# Altium PCB LASERDIODE_V1.1.1.PcbDoc (part 1 of 2)
Units mm, origin at the board's own origin, x right, y up, seen from the top; angles counter-clockwise.
Board outline 86 x 86 mm, 4 copper layers (Top Layer, Mid-Layer 1, Mid-Layer 2, Bottom Layer); 191 components, 97 nets, 928 pads, 583 vias.
Unrouted connection lines stored in the file: 478.
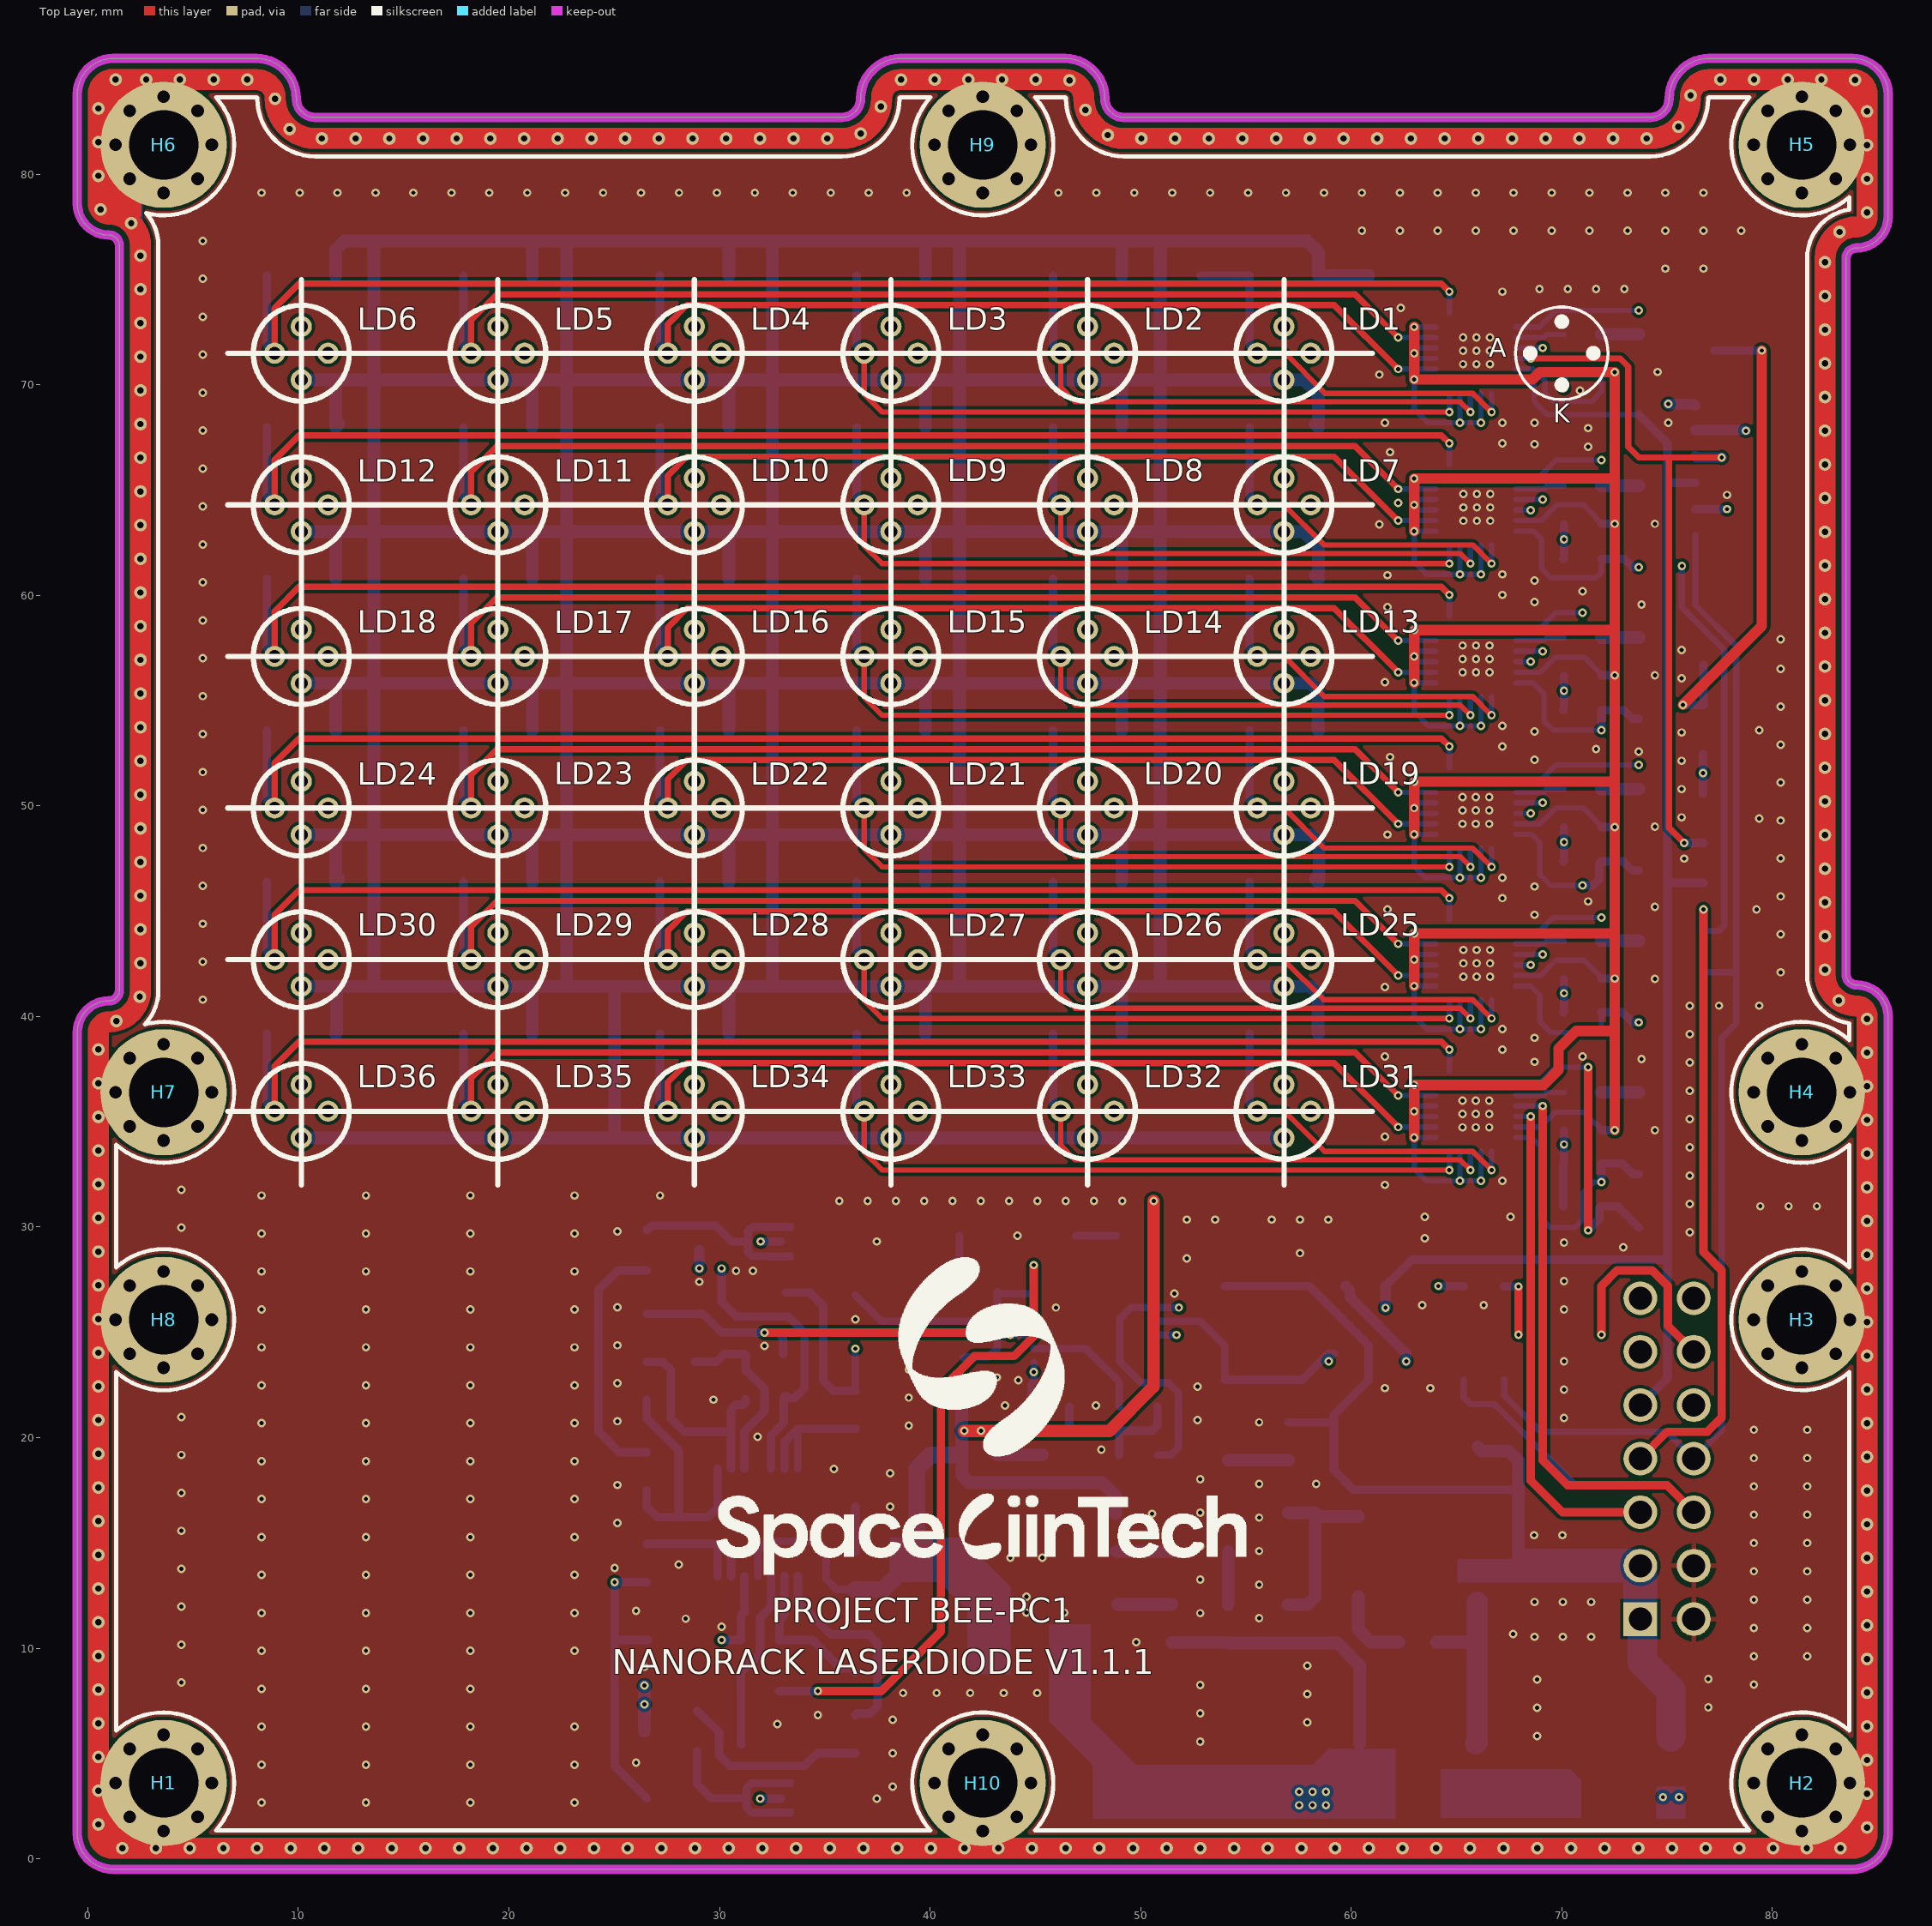
[diagram p0: Top Layer view]
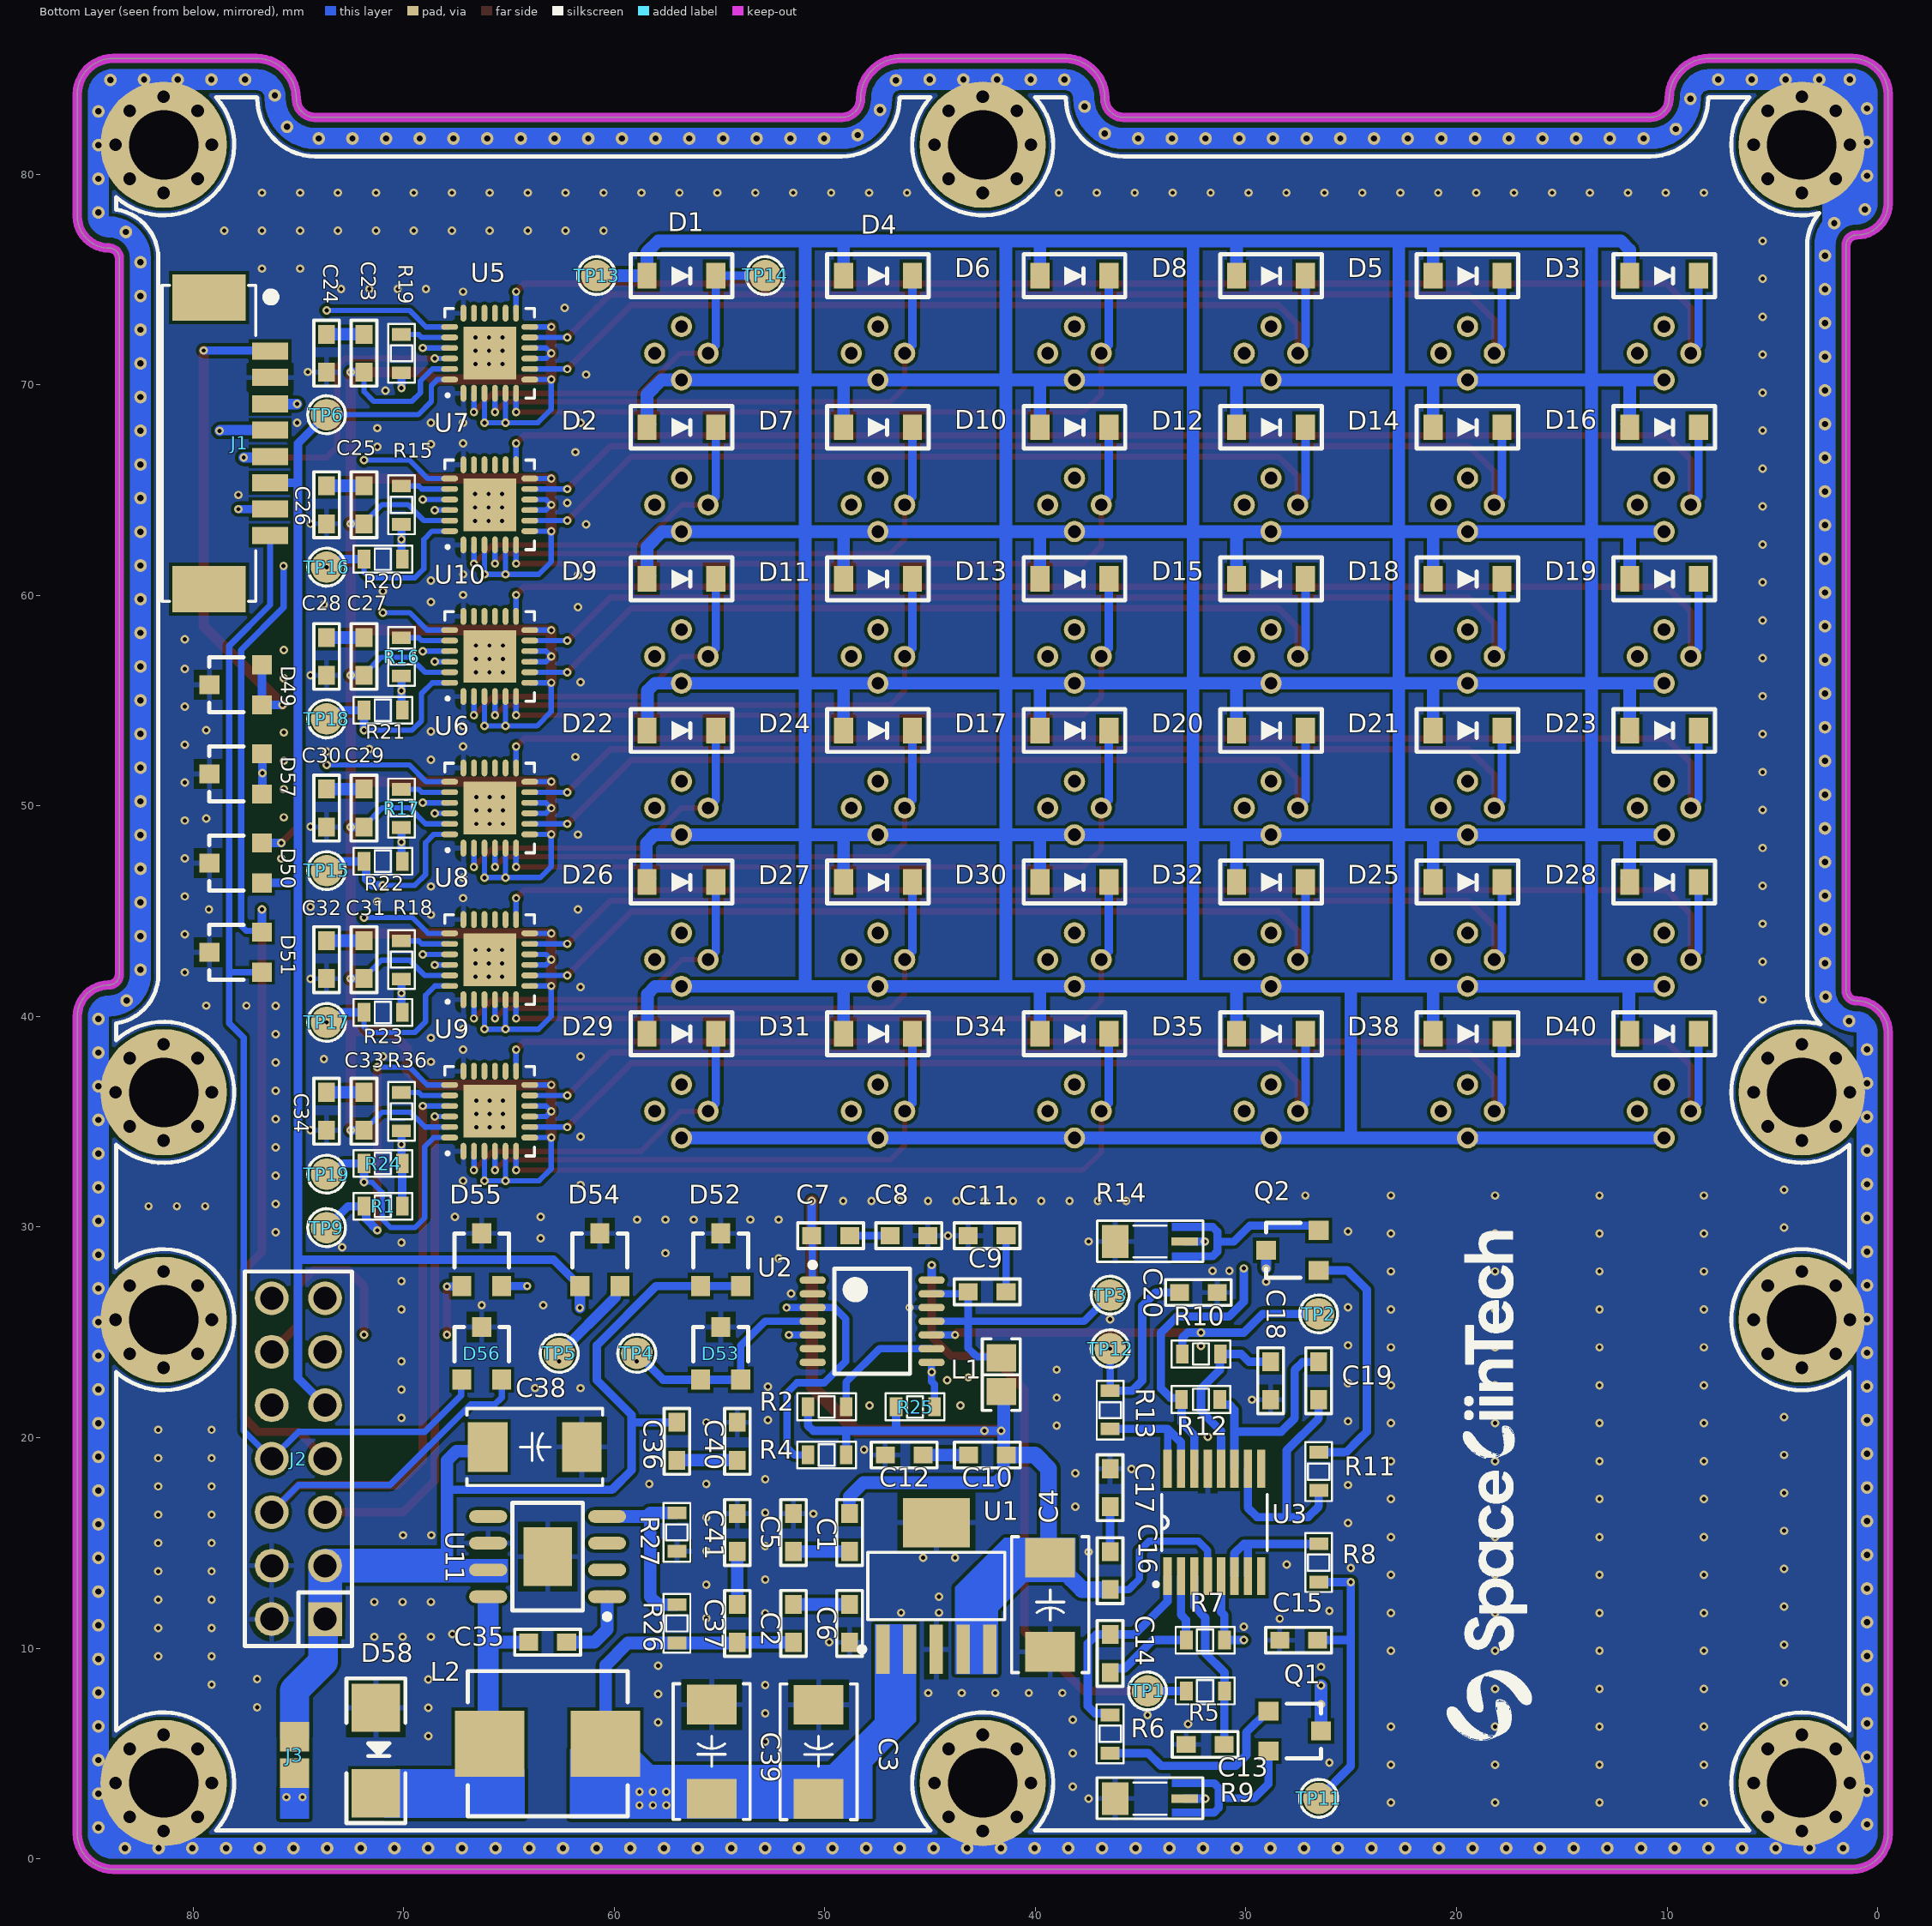
[diagram p1: Bottom Layer view, seen from below]
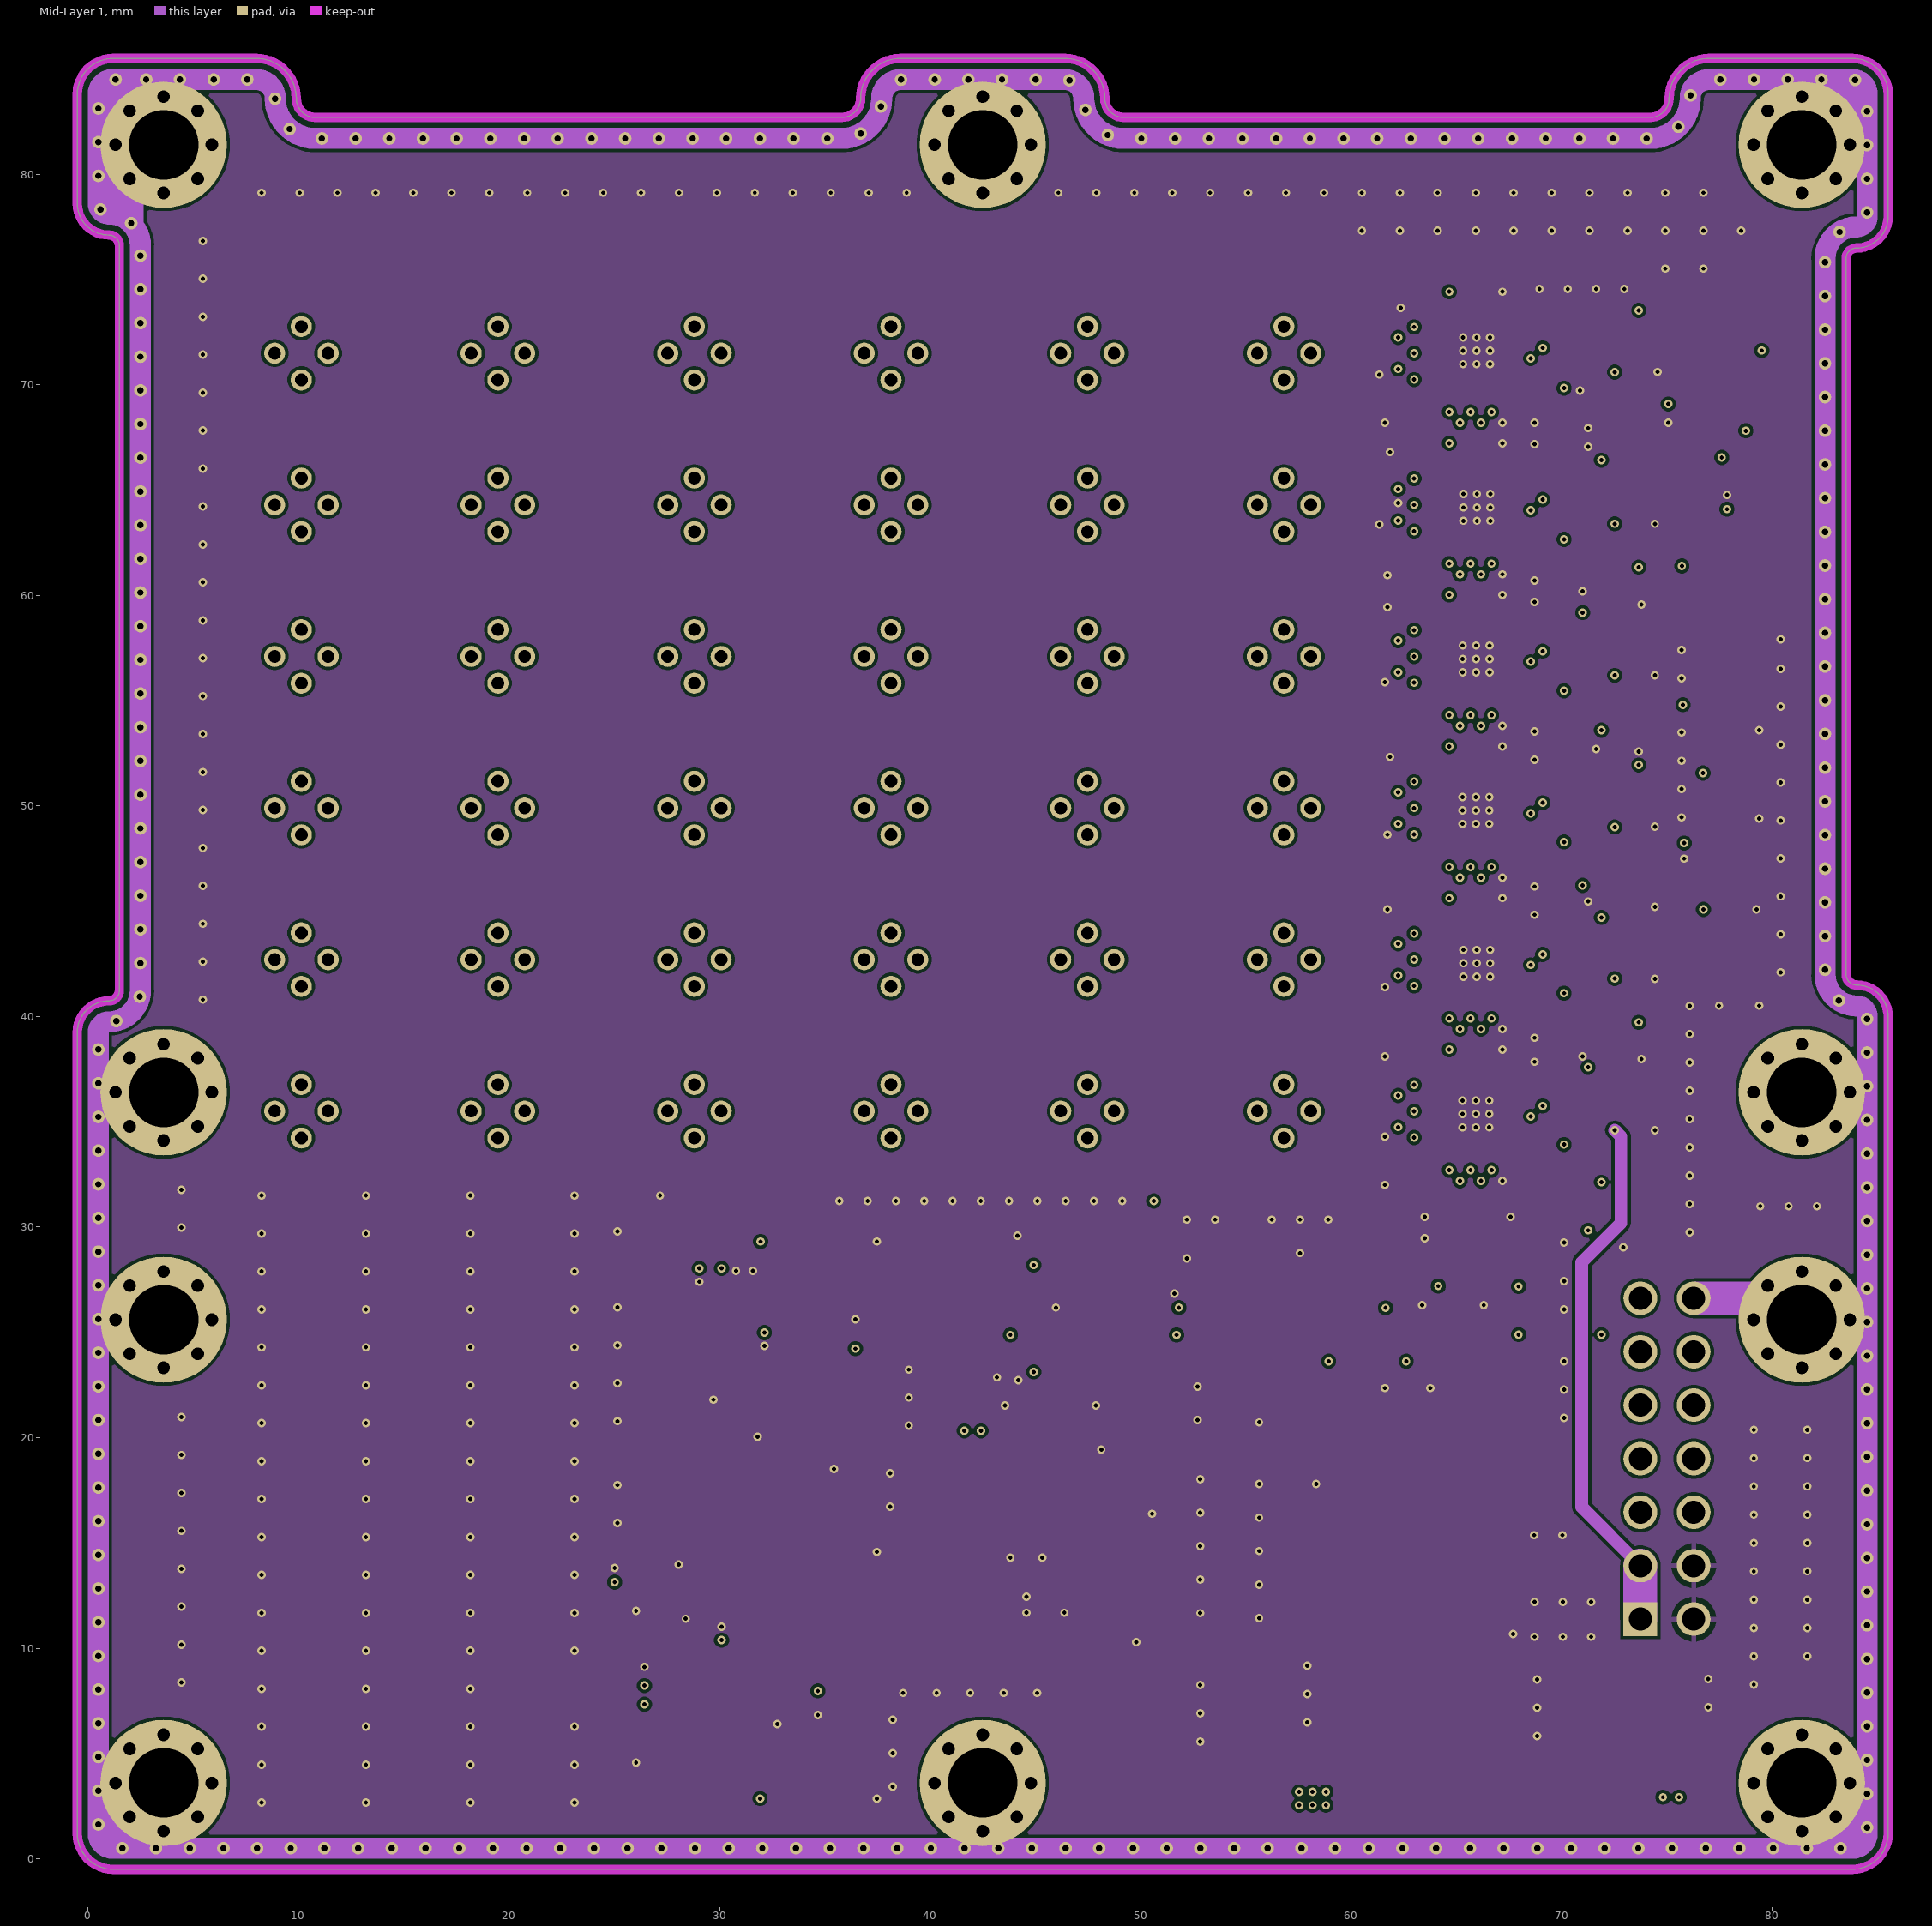
[diagram p2: Mid-Layer 1]
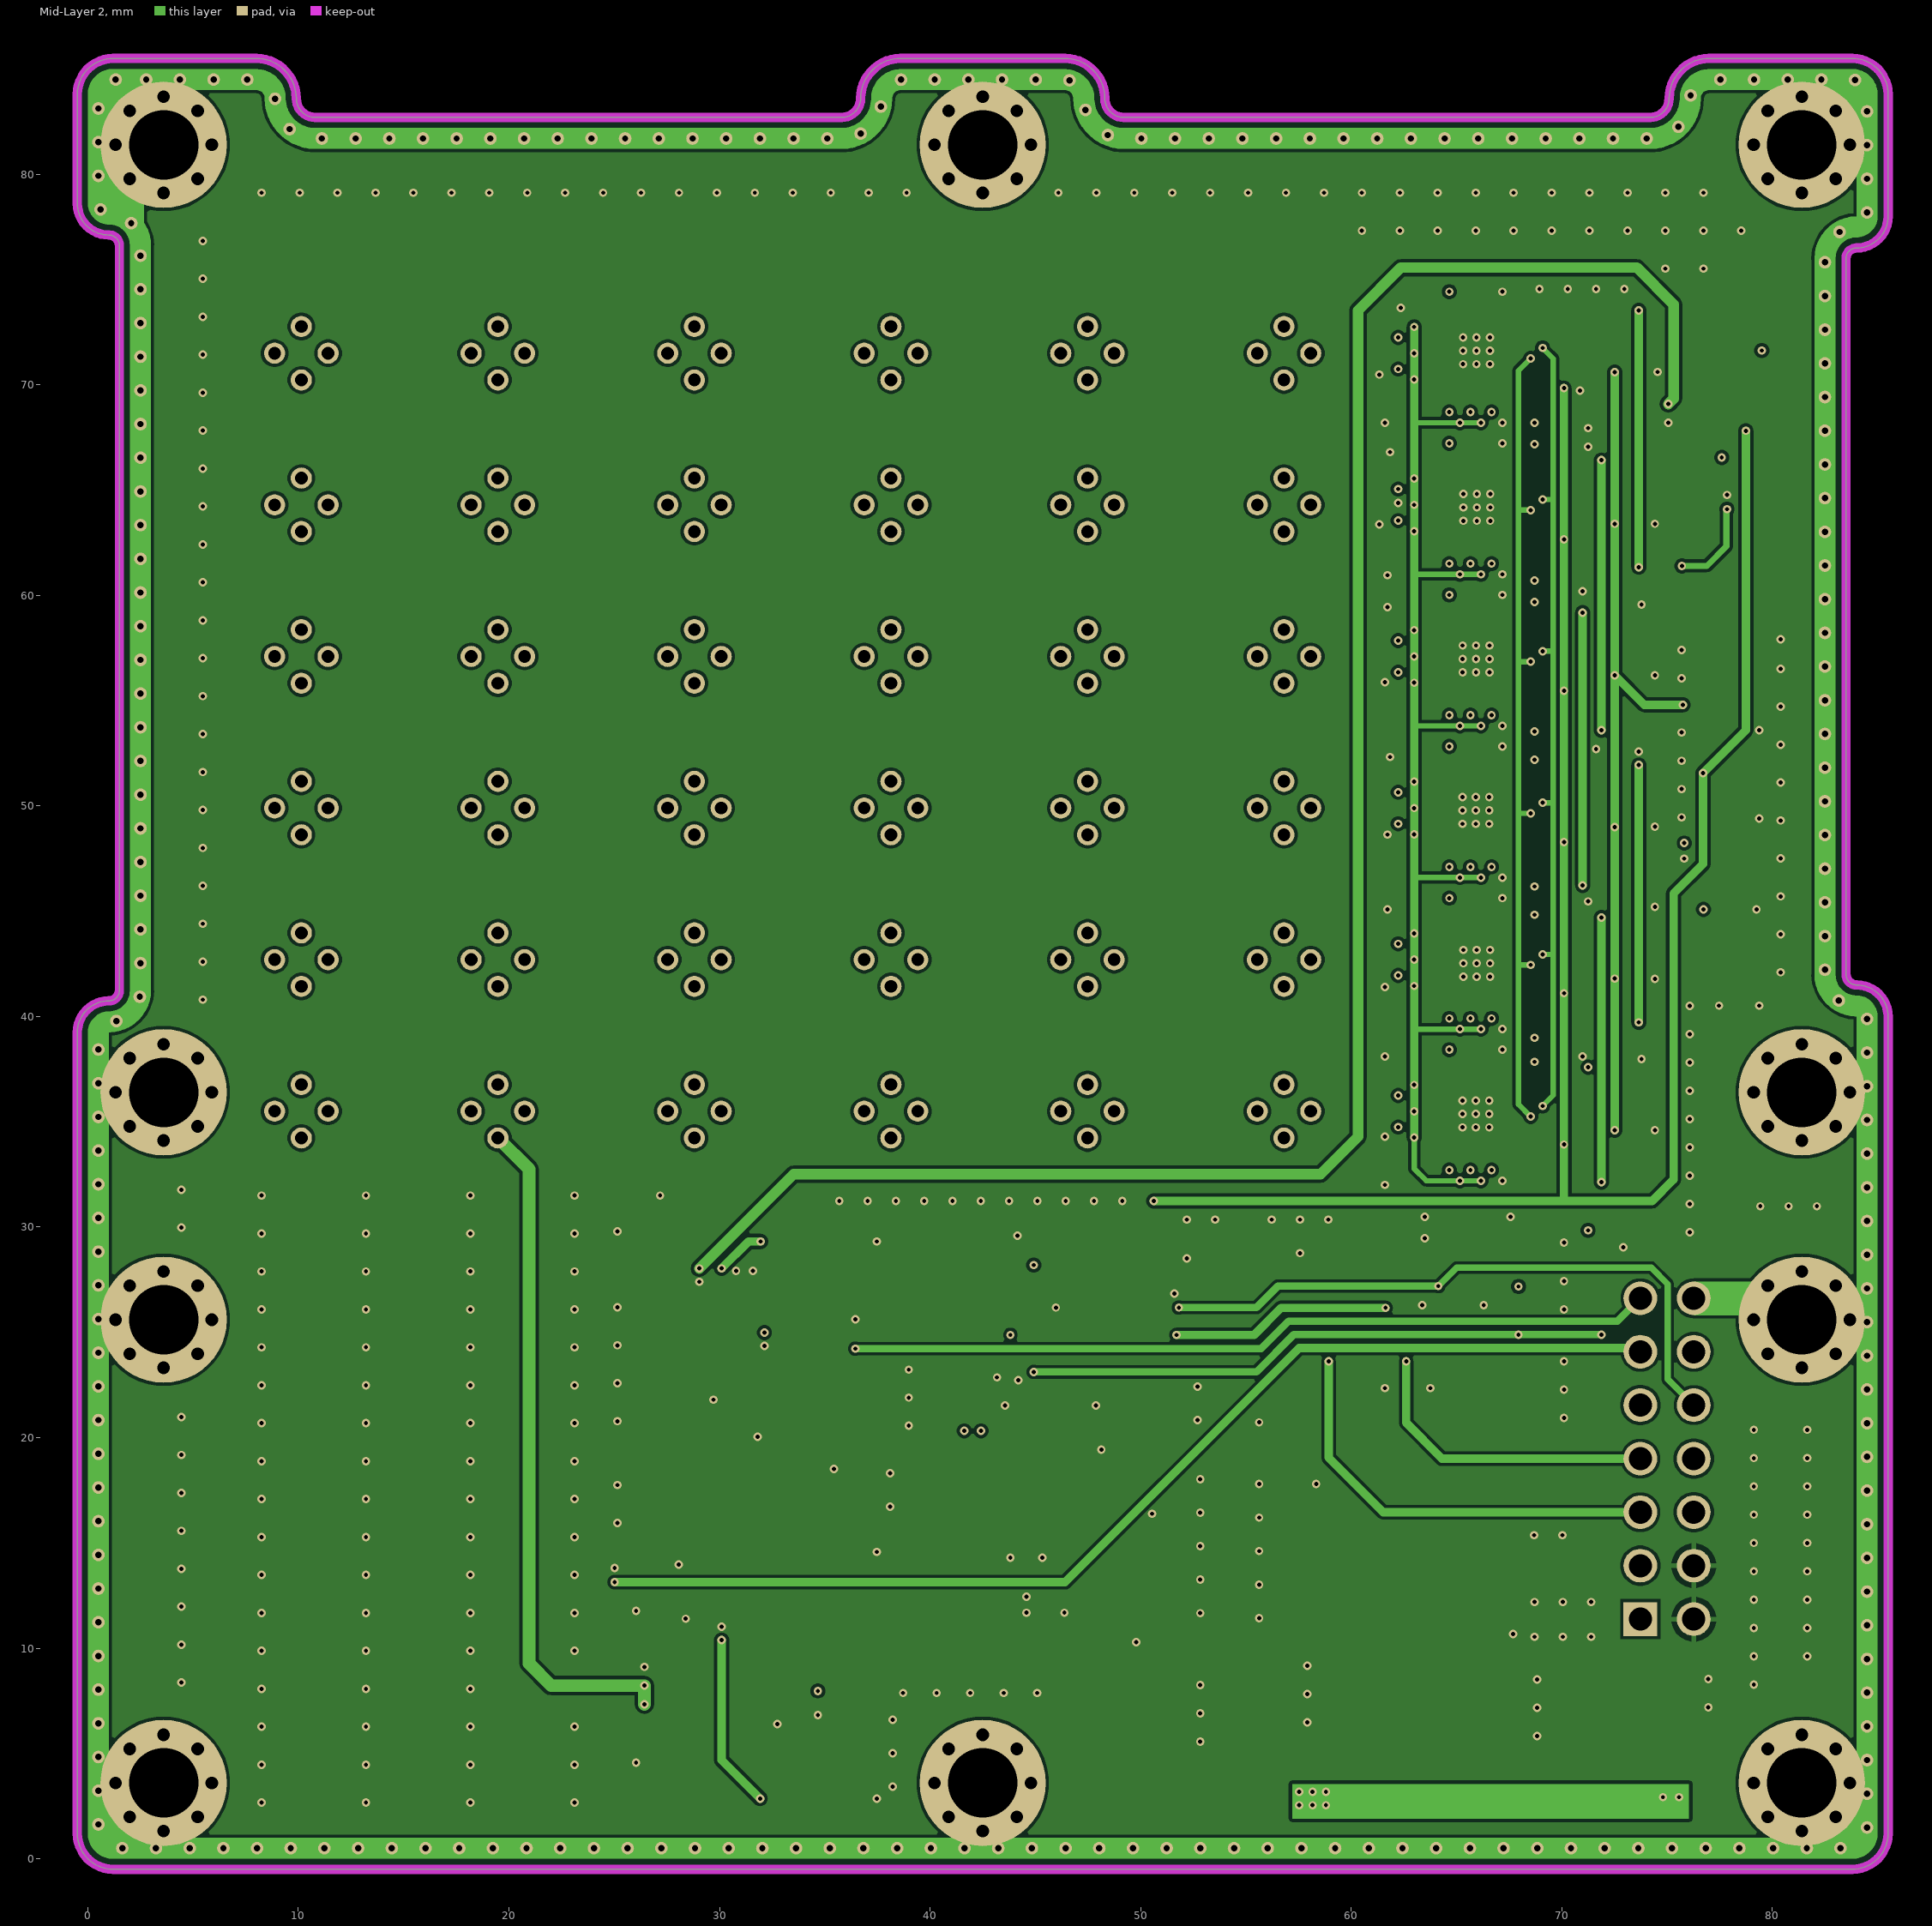
[diagram p3: Mid-Layer 2]

## Layer stack, top to bottom
Top Solder: solder mask 0.0102, Solder Resist, Dk 3.5
Top Layer: signal copper 0.0356
Dielectric 1: dielectric 0.32, FR-4, Dk 4.8
Mid-Layer 1: signal copper 0.0356
Dielectric2: dielectric 0.32, FR-4, Dk 4.8
Mid-Layer 2: signal copper 0.0356
Dielectric3: dielectric 0.32, FR-4, Dk 4.8
Bottom Layer: signal copper 0.0356
Bottom Solder: solder mask 0.0102, Solder Resist, Dk 3.5

## Board outline
-0.5,1.197 -0.5,39.243 -0.5,39.245 cw(c1,39.243) 1,40.743 ccw(c1,41.243) 1.5,41.243 1.5,76.613 ccw(c1,76.613) 1,77.113 cw(c1,78.613) -0.5,78.613 -0.5,83.8 cw(c1.2,83.8) 1.198,85.5 1.2,85.5 7.998,85.5 8,85.5 cw(c8,83.6) 9.9,83.602 9.9,83.6 ccw(c10.8,83.6) 10.8,82.7 35.8,82.7 ccw(c35.8,83.6) 36.7,83.6 36.7,83.602 cw(c38.6,83.6) 38.6,85.5 46.4,85.5 cw(c46.4,83.6) 48.3,83.602 48.3,83.6 ccw(c49.2,83.6) 49.2,82.7 74.2,82.7 ccw(c74.2,83.6) 75.1,83.6 75.1,83.602 cw(c77,83.6) 77,85.5 83.8,85.5 cw(c83.8,83.8) 85.5,83.8 85.5,78.01 85.5,78 cw(c84,78) 84,76.5 83.999,76.5 ccw(c84,76) 83.5,76 83.5,75.99 83.5,42 ccw(c84,42) 84,41.5 cw(c84,40) 85.5,40 85.5,1.202 85.5,1.2 cw(c83.8,1.2) 83.803,-0.5 83.8,-0.5 1.202,-0.5 1.2,-0.5 cw(c1.2,1.2)

## Design rules (kind name [scope] priority, off if disabled: settings)
Clearance [NOT InNet('SHIELD') and NOT OnLayer('Keep-Out Layer')] p1: gap=0.15 ignorepadtopadclearanceinfootprint=FALSE
FanoutControl Fanout_Default [All] p1: bgadir=Out bgaviamode=Centered fanoutstyle=Auto fanoutdirection=Alternating viagrid=0.025 // Fanout_Default (Default Rule)
FanoutControl Fanout_Small [(CompPinCount < 5)] p2: bgadir=Out bgaviamode=Centered fanoutstyle=Auto fanoutdirection=OutThenIn viagrid=0.025 // Fanout_Small (Default Rule)
FanoutControl Fanout_LCC [IsLCC] p4: bgadir=Out bgaviamode=Centered fanoutstyle=Auto fanoutdirection=Alternating viagrid=0.025 // Fanout_LCC (Default Rule)
FanoutControl Fanout_BGA [IsBGA] p5: bgadir=Out bgaviamode=Centered fanoutstyle=Auto fanoutdirection=Alternating viagrid=0.025 // Fanout_BGA (Default Rule)
HoleSize [All] p1: absolutevalues=TRUE maxlimit=4 minlimit=0.025 maxpercent=80.000 minpercent=20.000
HoleToHoleClearance [All] p1: gap=0.15 allowstackedmicrovias=TRUE
MinimumSolderMaskSliver [All] p1: minsoldermaskwidth=0.17
PolygonConnect [All] p1: thpad.connectstyle=Relief thpad.reliefconductorwidth=0.254 thpad.reliefentries=4 thpad.polygonreliefangle="90 Angle" thpad.airgapwidth=0.254 smdpad.connectstyle=Relief smdpad.reliefconductorwidth=0.254 smdpad.reliefentries=4 smdpad.polygonreliefangle="90 Angle" smdpad.airgapwidth=0.254 via.connectstyle=Direct via.reliefconductorwidth=0.254 via.reliefentries=4 via.polygonreliefangle="90 Angle" via.airgapwidth=0.254
RoutingVias [All] p1: holewidth=0.711 width=1.27 viastyle="Through Hole" minholewidth=0.2 minwidth=0.4 maxholewidth=0.711 maxwidth=1.27
SilkToSilkClearance [All] p1: silktosilkclearance=0.12
SilkToSolderMaskClearance [IsPad] p1: minsilkscreentomaskgap=0.12 clearancetoexposedcopper=TRUE
SolderMaskExpansion [All] p1: expansion=0.102 istentingtop=FALSE
Width [All] p1: maxlimit=3 minlimit=0.254 preferedwidth=0.6 minimp=50.000000 maximp=50.000000 favimp=50.000000
21 further rules are at their usual default settings.

## Classes and differential pairs
component class SWITCHING: C23 C24 C25 C26 C27 C28 C29 C30 C31 C32 C33 C34 D1 D2 D3 D4 D5 D6 D7 D8 D9 D10 D11 D12 D13 D14 D15 D16 D17 D18 D19 D20 D21 D22 D23 D24 D25 D26 D27 D28 D29 D30 D31 D32 D34 D35 D38 D40 LD1 LD2 LD3 LD4 LD5 LD6 LD7 LD8 LD9 LD10 LD11 LD12 LD13 LD14 LD15 LD16 LD17 LD18 LD19 LD20 LD21 LD22 LD23 LD24 LD25 LD26 LD27 LD28 LD29 LD30 LD31 LD32 LD33 LD34 LD35 LD36 R1 R15 R16 R17 R18 R19 R20 R21 R22 R23 R24 R36 t TP9 TP13 TP14 TP15 TP16 TP17 TP18 TP19 U5 U6 U7 U8 U9 U10
component class CURRENT_SOURCE: C13 C14 C15 C16 C17 C18 C19 C20 Q1 Q2 R5 R6 R7 R8 R9 R10 R11 R12 R13 R14 TP11 TP12 U3
component class "POWER SWITCH AND LDO": C1 C2 C3 C4 C5 C6 C35 C36 C37 C38 C39 C40 C41 D58 J3 L2 R26 R27 U1 U11
component class COMMUNICATION: C7 C8 C9 C10 C11 C12 D49 D50 D51 D52 D53 D54 D55 D56 D57 H1 H2 H3 H4 H5 H6 H7 H8 J1 J2 L1 R2 R4 R25 TP1 TP2 TP3 TP4 TP5 TP6 U2

## Components (designator, comment, footprint, x,y, rotation, side; value= is the part's Value field where it differs from the comment)
C1 "0.22uF/25V" SM-0603 48.819,15.494 r90 bottom
C2 "0.22uF/25V" SM-0603 51.486,11.176 r270 bottom
C3 "100uF/16V" "CAP TANT 2312" 50.292,5.08 r90 bottom
C4 "100uF/16V" "CAP TANT 2312" 39.294,12.065 r270 bottom
C5 "0.22uF/25V" SM-0603 51.486,15.494 r270 bottom
C6 "0.22uF/25V" SM-0603 48.819,11.176 r90 bottom
C7 "0.22uF/25V" SM-0603 49.72,29.589 r0 bottom
C8 "0.22uF/25V" SM-0603 46.005,29.589 r0 bottom
C9 "0.22uF/25V" SM-0603 42.291,26.924 r0 bottom
C10 "0.22uF/25V" SM-0603 42.28,19.177 r180 bottom
C11 "0.22uF/25V" SM-0603 42.291,29.589 r180 bottom
C12 "0.22uF/25V" SM-0603 46.228,19.177 r180 bottom
C13 "470pF/50V" SM-0603 31.94,5.429 r180 bottom
C14 "0.22uF/25V" SM-0603 36.449,9.747 r90 bottom
C15 "470pF/50V" SM-0603 27.496,10.382 r180 bottom
C16 "0.22uF/25V" SM-0603 36.449,13.684 r270 bottom
C17 "0.22uF/25V" SM-0603 36.449,17.621 r270 bottom
C18 "470pF/50V" SM-0603 28.829,22.701 r90 bottom
C19 "0.22uF/25V" SM-0603 26.543,22.701 r270 bottom
C20 "470pF/50V" SM-0603 32.258,26.892 r0 bottom
C23 "0.22uF/25V" SM-0603 71.882,71.5 r270 bottom
C24 "0.22uF/25V" SM-0603 73.66,71.5 r90 bottom
C25 "0.22uF/25V" SM-0603 71.882,64.3 r270 bottom
C26 "0.22uF/25V" SM-0603 73.66,64.3 r90 bottom
C27 "0.22uF/25V" SM-0603 71.882,57.1 r270 bottom
C28 "0.22uF/25V" SM-0603 73.66,57.1 r90 bottom
C29 "0.22uF/25V" SM-0603 71.882,49.9 r270 bottom
C30 "0.22uF/25V" SM-0603 73.66,49.9 r90 bottom
C31 "0.22uF/25V" SM-0603 71.882,42.7 r270 bottom
C32 "0.22uF/25V" SM-0603 73.66,42.7 r90 bottom
C33 "0.22uF/25V" SM-0603 71.882,35.5 r270 bottom
C34 "0.22uF/25V" SM-0603 73.66,35.5 r90 bottom
C35 "0.01uF/25V" SM-0603 63.163,10.287 r180 bottom
C36 "0.22uF/25V" SM-0603 57.023,19.825 r90 bottom
C37 "0.22uF/25V" SM-0603 54.153,11.176 r270 bottom
C38 "100uF/16V" "CAP TANT 2312" 63.772,19.558 r180 bottom
C39 "100uF/16V" "CAP TANT 2312" 55.372,5.089 r90 bottom
C40 "0.22uF/25V" SM-0603 54.153,19.825 r270 bottom
C41 "0.22uF/25V" SM-0603 54.153,15.494 r270 bottom
D1 "1N4148W-TP" SOD23 58.461,75.184 r180 bottom
D2 "1N4148W-TP" SOD23 58.461,67.984 r180 bottom
D3 "1N4148W-TP" SOD23 11.791,75.184 r180 bottom
D4 "1N4148W-TP" SOD23 49.127,75.184 r180 bottom
D5 "1N4148W-TP" SOD23 21.125,75.184 r180 bottom
D6 "1N4148W-TP" SOD23 39.793,75.184 r180 bottom
D7 "1N4148W-TP" SOD23 49.127,67.984 r180 bottom
D8 "1N4148W-TP" SOD23 30.459,75.184 r180 bottom
D9 "1N4148W-TP" SOD23 58.461,60.784 r180 bottom
D10 "1N4148W-TP" SOD23 39.793,67.984 r180 bottom
D11 "1N4148W-TP" SOD23 49.127,60.784 r180 bottom
D12 "1N4148W-TP" SOD23 30.459,67.984 r180 bottom
D13 "1N4148W-TP" SOD23 39.793,60.784 r180 bottom
D14 "1N4148W-TP" SOD23 21.125,67.984 r180 bottom
D15 "1N4148W-TP" SOD23 30.459,60.784 r180 bottom
D16 "1N4148W-TP" SOD23 11.791,67.984 r180 bottom
D17 "1N4148W-TP" SOD23 39.793,53.584 r180 bottom
D18 "1N4148W-TP" SOD23 21.125,60.784 r180 bottom
D19 "1N4148W-TP" SOD23 11.791,60.784 r180 bottom
D20 "1N4148W-TP" SOD23 30.459,53.584 r180 bottom
D21 "1N4148W-TP" SOD23 21.125,53.584 r180 bottom
D22 "1N4148W-TP" SOD23 58.461,53.584 r180 bottom
D23 "1N4148W-TP" SOD23 11.791,53.584 r180 bottom
D24 "1N4148W-TP" SOD23 49.127,53.584 r180 bottom
D25 "1N4148W-TP" SOD23 21.125,46.384 r180 bottom
D26 "1N4148W-TP" SOD23 58.461,46.384 r180 bottom
D27 "1N4148W-TP" SOD23 49.127,46.384 r180 bottom
D28 "1N4148W-TP" SOD23 11.791,46.384 r180 bottom
D29 "1N4148W-TP" SOD23 58.461,39.184 r180 bottom
D30 "1N4148W-TP" SOD23 39.793,46.384 r180 bottom
D31 "1N4148W-TP" SOD23 49.127,39.184 r180 bottom
D32 "1N4148W-TP" SOD23 30.459,46.384 r180 bottom
D34 "1N4148W-TP" SOD23 39.793,39.184 r180 bottom
D35 "1N4148W-TP" SOD23 30.459,39.184 r180 bottom
D38 "1N4148W-TP" SOD23 21.125,39.184 r180 bottom
D40 "1N4148W-TP" SOD23 11.791,39.184 r180 bottom
D49 "S2312" SOT23-123 77.978,55.753 r90 bottom
D50 "S2303" SOT23-123 77.978,47.286 r90 bottom
D51 "S2303" SOT23-123 77.978,43.053 r90 bottom
D52 "S2312" SOT23-123 54.943,28.448 r180 bottom
D53 "S2303" SOT23-123 54.943,24.003 r180 bottom
D54 "S2303" SOT23-123 60.682,28.448 r180 bottom
D55 "S2303" SOT23-123 66.294,28.448 r180 bottom
D56 "S2303" SOT23-123 66.294,24.003 r180 bottom
D57 "S2303" SOT23-123 77.978,51.52 r90 bottom
D58 "SS54" DIO-SMD-A 71.19,5.265 r90 bottom
H1 "HOLD" M3 3.6,3.6 r0 top
H2 "HOLD" M3 81.4,3.6 r0 top
H3 "HOLD" M3 81.4,25.6 r0 top
H4 "HOLD" M3 81.4,36.4 r0 top
H5 "HOLD" M3 81.4,81.4 r0 top
H6 "HOLD" M3 3.6,81.4 r0 top
H7 "HOLD" M3 3.6,36.4 r0 top
H8 "HOLD" M3 3.6,25.6 r0 top
H9 "HOLD" M3 42.5,81.4 r0 top
H10 "HOLD" M3 42.5,3.6 r0 top
J1 "LASER EXT" 0532610871 79.248,67.223 r90 bottom
J2 "JP7x2" JP7-D2T 75,19 r90 bottom
J3 "BYPASS/DNP" BIG_CONNECTOR 75.184,5.794 r270 bottom
L1 "10uH" "FER 0805/2012" 41.617,22.987 r270 bottom
L2 "15uH/3.5A" SRP7050TA 63.163,5.461 r180 bottom
LD1 "LaserDiode" LASER_SOCKET 56.81,71.5 r0 top
LD2 "LaserDiode" LASER_SOCKET 47.476,71.5 r0 top
LD3 "LaserDiode" LASER_SOCKET 38.142,71.5 r0 top
LD4 "LaserDiode" LASER_SOCKET 28.808,71.5 r0 top
LD5 "LaserDiode" LASER_SOCKET 19.474,71.5 r0 top
LD6 "LaserDiode" LASER_SOCKET 10.14,71.5 r0 top
LD7 "LaserDiode" LASER_SOCKET 56.81,64.3 r0 top
LD8 "LaserDiode" LASER_SOCKET 47.476,64.3 r0 top
LD9 "LaserDiode" LASER_SOCKET 38.142,64.3 r0 top
LD10 "LaserDiode" LASER_SOCKET 28.808,64.3 r0 top
LD11 "LaserDiode" LASER_SOCKET 19.474,64.3 r0 top
LD12 "LaserDiode" LASER_SOCKET 10.14,64.3 r0 top
LD13 "LaserDiode" LASER_SOCKET 56.81,57.1 r0 top
LD14 "LaserDiode" LASER_SOCKET 47.476,57.1 r0 top
LD15 "LaserDiode" LASER_SOCKET 38.142,57.1 r0 top
LD16 "LaserDiode" LASER_SOCKET 28.808,57.1 r0 top
LD17 "LaserDiode" LASER_SOCKET 19.474,57.1 r0 top
LD18 "LaserDiode" LASER_SOCKET 10.14,57.1 r0 top
LD19 "LaserDiode" LASER_SOCKET 56.81,49.9 r0 top
LD20 "LaserDiode" LASER_SOCKET 47.476,49.9 r0 top
LD21 "LaserDiode" LASER_SOCKET 38.142,49.9 r0 top
LD22 "LaserDiode" LASER_SOCKET 28.808,49.9 r0 top
LD23 "LaserDiode" LASER_SOCKET 19.474,49.9 r0 top
LD24 "LaserDiode" LASER_SOCKET 10.14,49.9 r0 top
LD25 "LaserDiode" LASER_SOCKET 56.81,42.7 r0 top
LD26 "LaserDiode" LASER_SOCKET 47.476,42.7 r0 top
LD27 "LaserDiode" LASER_SOCKET 38.142,42.7 r0 top
LD28 "LaserDiode" LASER_SOCKET 28.808,42.7 r0 top
LD29 "LaserDiode" LASER_SOCKET 19.474,42.7 r0 top
LD30 "LaserDiode" LASER_SOCKET 10.14,42.7 r0 top
LD31 "LaserDiode" LASER_SOCKET 56.81,35.5 r0 top
LD32 "LaserDiode" LASER_SOCKET 47.476,35.5 r0 top
LD33 "LaserDiode" LASER_SOCKET 38.142,35.5 r0 top
LD34 "LaserDiode" LASER_SOCKET 28.808,35.5 r0 top
LD35 "LaserDiode" LASER_SOCKET 19.474,35.5 r0 top
LD36 "LaserDiode" LASER_SOCKET 10.14,35.5 r0 top
Q1 "AO3400" SOT23-132 27.685,6.064 r270 bottom
Q2 "AO3400" SOT23-132 27.793,28.894 r90 bottom
R1 "4.7K 1%" RES-SMD-0603 70.993,30.988 r180 bottom
R2 "4.7K 1%" RES-SMD-0603 49.911,21.463 r180 bottom
R4 "4.7K 1%" RES-SMD-0603 49.911,19.177 r180 bottom
R5 "50R 1%" RES-SMD-0603 31.94,7.969 r180 bottom
R6 "100R 1%" RES-SMD-0603 36.45,5.937 r270 bottom
R7 "1K 1%" RES-SMD-0603 31.94,10.382 r180 bottom
R8 "50R 1%" RES-SMD-0603 26.543,14.065 r270 bottom
R9 "250R 1%" RES-SMD-1206 34.557,2.86 r180 bottom
R10 "50R 1%" RES-SMD-0603 32.131,23.971 r180 bottom
R11 "100R 1%" RES-SMD-0603 26.543,18.383 r90 bottom
R12 "1K 1%" RES-SMD-0603 32.131,21.812 r0 bottom
R13 "50R 1%" RES-SMD-0603 36.449,21.304 r90 bottom
R14 "250R 1%" RES-SMD-1206 34.556,29.315 r180 bottom
R15 "4.7K 1%" RES-SMD-0603 70.104,64.3 r270 bottom
R16 "4.7K 1%" RES-SMD-0603 70.104,57.1 r270 bottom
R17 "4.7K 1%" RES-SMD-0603 70.104,49.9 r270 bottom
R18 "4.7K 1%" RES-SMD-0603 70.104,42.7 r270 bottom
R19 "4.7K 1%" RES-SMD-0603 70.104,71.5 r270 bottom
R20 "4.7K 1%" RES-SMD-0603 70.993,61.722 r180 bottom
R21 "4.7K 1%" RES-SMD-0603 70.993,54.546 r180 bottom
R22 "4.7K 1%" RES-SMD-0603 70.993,47.371 r180 bottom
R23 "4.7K 1%" RES-SMD-0603 70.993,40.195 r180 bottom
R24 "4.7K 1%" RES-SMD-0603 70.993,33.02 r180 bottom
R25 "4.7K 1%" RES-SMD-0603 45.72,21.463 r180 bottom
R26 "10K 1%" RES-SMD-0603 57.023,11.176 r270 bottom
R27 "3.24K 0.1%" RES-SMD-0603 57.023,15.494 r90 bottom
R36 "4.7K 1%" RES-SMD-0603 70.104,35.5 r270 bottom
TP1 "Test_Point" TESTPOINT 34.671,7.969 r180 bottom
TP2 "Test_Point" TESTPOINT 26.543,25.876 r90 bottom
TP3 "Test_Point" TESTPOINT 36.449,26.765 r90 bottom
TP4 "Test_Point" TESTPOINT 58.928,24.003 r90 bottom
TP5 "Test_Point" TESTPOINT 62.611,24.003 r90 bottom
TP6 "Test_Point" TESTPOINT 73.66,68.58 r90 bottom
TP9 "Test_Point" TESTPOINT 73.66,29.972 r90 bottom
TP11 "Test_Point" TESTPOINT 26.543,2.872 r0 bottom
TP12 "Test_Point" TESTPOINT 36.449,24.225 r90 bottom
TP13 "Test_Point" TESTPOINT 60.833,75.184 r90 bottom
TP14 "Test_Point" TESTPOINT 52.832,75.184 r90 bottom
TP15 "Test_Point" TESTPOINT 73.66,46.926 r90 bottom
TP16 "Test_Point" TESTPOINT 73.66,61.341 r90 bottom
TP17 "Test_Point" TESTPOINT 73.66,39.719 r90 bottom
TP18 "Test_Point" TESTPOINT 73.66,54.134 r180 bottom
TP19 "Test_Point" TESTPOINT 73.66,32.512 r180 bottom
U1 "TPS7A4533DCQR" SOT223-6 44.704,12.954 r90 bottom
U2 "MCP4902-E/ST" TSSOP14 47.752,25.527 r180 bottom
U3 "OPA4340" SSOP16 31.496,15.97 r90 bottom
U5 "ADG1414BCPZ" ADG1414BCPZ 65.913,71.5 r90 bottom
U6 "ADG1414BCPZ" ADG1414BCPZ 65.913,49.9 r90 bottom
U7 "ADG1414BCPZ" ADG1414BCPZ 65.913,64.3 r90 bottom
U8 "ADG1414BCPZ" ADG1414BCPZ 65.913,42.7 r90 bottom
U9 "ADG1414BCPZ" ADG1414BCPZ 65.913,35.5 r90 bottom
U10 "ADG1414BCPZ" ADG1414BCPZ 65.913,57.1 r90 bottom
U11 "TPS5430DDAR" HSOP8 63.163,14.351 r0 bottom

## Footprints (in the part's own frame and the unit in brackets; to place one, negate y for a bottom-side part, rotate by r counter-clockwise, add the part's x,y. Pads: shape width x height; smd on the part's side, far side on the other; paste and mask are expansions set on the pad)
0532610871 [mil] "CONN HEADER SMD R/A 8POS 1.25MM"
  rect 32x67 smd paste+0 mask+0: 1(172.24,-114.35) 2(123.03,-114.35) 3(73.82,-114.35) 4(24.61,-114.35) 5(-24.61,-114.35) 6(-73.82,-114.35) 7(-123.03,-114.35) 8(-172.24,-114.35)
  rect 87x137.8 smd mask+1.97: 9(-272.64,-0.18) 10(272.64,-0.18)
  silkscreen extent -296,-122 296,88, body extent -299,-123 298,81, height 134
ADG1414BCPZ [mm] "IC SW SPST-NOX8 11.5OHM 24LFCSP"
  rrect100% 0.805x0.275 smd mask+0.05: 1(-1.902,1.25) 2(-1.902,0.75) 3(-1.902,0.25) 4(-1.902,-0.25) 5(-1.902,-0.75) 6(-1.902,-1.25) 13(1.902,-1.25) 14(1.902,-0.75) 15(1.902,-0.25) 16(1.902,0.25) 17(1.902,0.75) 18(1.902,1.25)
  rrect100% 0.275x0.805 smd mask+0.05: 7(-1.25,-1.902) 8(-0.75,-1.902) 9(-0.25,-1.902) 10(0.25,-1.902) 11(0.75,-1.902) 12(1.25,-1.902) 19(1.25,1.902) 20(0.75,1.902) 21(0.25,1.902) 22(-0.25,1.902) 23(-0.75,1.902) 24(-1.25,1.902)
  rect 2.5x2.5 smd paste+0 mask+0.05: HTAB(0,0)
  silkscreen extent -2.13,-2.13 2.13,2.13, body extent -2,-2 2,2, height 0.6
BIG_CONNECTOR [mm]
  rect 1.4x1.4 smd: 1(0,0) 2(1.73,0)
"CAP TANT 2312" [mil]
  rect 74x93 smd paste+0 mask+0: 1(-88,0) 2(88,0)
  silkscreen extent -127,-72 127,72, body extent -118,-63 118,63, height 110
DIO-SMD-A [mil]
  rect 90x90.55 smd: 1(75,5) 2(-85,5)
  silkscreen extent -141,-50 130,60, body extent -104,-45 101,57, height 95
"FER 0805/2012" [mm] "Chip Ferrite, 2-Leads, Body 2.00x1.20mm, IPC Medium Density"
  rect 1.3x1.4 smd mask+0.05: 1(-0.8,0) 2(0.8,0)
  silkscreen extent -1.7,-0.9 1.7,0.9, body extent -1,-0.64 1,0.64, height 1.26
HSOP8 [mm] "SOIC, 8-Leads, Body 4.9x3.9mm, Pitch 1.27mm, IPC High Density"
  oval 1.8x0.6 smd: 1(-2.825,1.905) 2(-2.825,0.635) 3(-2.825,-0.635) 4(-2.825,-1.905) 5(2.825,-1.905) 6(2.825,-0.635) 7(2.825,0.635) 8(2.825,1.905)
  rect 2.3x2.8 smd: 9(0,0)
  silkscreen extent -2.95,-2.55 1.68,2.98, body extent -2.99,-2.45 3,2.45, height 1.6
JP7-D2T [mm] "14 pins, dual pin, straight, gold plating"
  rect 1.6x1.6 hole 1.1: 1(-7.62,-1.27)
  round 1.6 hole 1.1: 2(-5.08,-1.27) 3(-2.54,-1.27) 4(0,-1.27) 5(2.54,-1.27) 6(5.08,-1.27) 7(7.62,-1.27) 8(7.62,1.27) 9(5.08,1.27) 10(2.54,1.27) 11(0,1.27) 12(-2.54,1.27) 13(-5.08,1.27) 14(-7.62,1.27)
  silkscreen extent -8.89,-2.54 8.89,2.54, body extent -8.89,-2.54 8.89,2.54, height 8.55
LASER_SOCKET [mm]
  round 1 hole 0.6: 1(-1.27,0) 2(0,-1.27) 3(0,1.27) 4(1.27,0)
  silkscreen extent -2.28,-2.28 2.28,2.28, body extent -1.75,-1.75 1.75,1.75, height 7.62
M3 [mm]
  round 1.2 hole 0.6: 1(-2.286,0) 1(-1.616,-1.616) 1(-1.616,1.616) 1(0,-2.286) 1(0,2.286) 1(1.616,-1.616) 1(1.616,1.616) 1(2.286,0)
  round 6 hole 3.3: 1(0,0)
RES-SMD-0603 [mm]
  rect 0.6x0.9 smd: 1(-0.889,0) 2(0.927,0)
  silkscreen extent -1.4,-0.64 1.4,0.64, body extent -0.8,-0.4 0.8,0.4, height 0.43
RES-SMD-1206 [mm]
  rect 1.27x1.55 smd: 1(-1.651,0)
  rect 1.27x0.4 smd: 2(1.651,0)
  silkscreen extent -2.51,-0.97 2.51,0.99, body extent -1.6,-0.8 1.6,0.8, height 1.02
SM-0603 [mm]
  rect 0.9x0.8 smd: 1(-0.9,0) 2(0.9,0)
  silkscreen extent -1.56,-0.61 1.56,0.61, body extent -0.81,-0.4 0.79,0.4, height 0.5
SOD23 [mm]
  rect 0.91x1.22 smd: 1(0.016,0) 2(3.286,0)
  silkscreen extent -0.76,-1.02 4.06,1.02, body extent -0.22,-0.85 3.53,0.85, height 1.2
SOT23-123 [mm] "SOT23, 1=bottom-left, 2=top, 3=bottom-right"
  rect 0.9x0.95 smd: 1(-0.95,-1.25) 2(0,1.25)
  rect 0.9x0.95 smd mask+0: 3(0.95,-1.25)
  silkscreen extent -1.3,-0.38 1.3,1.25, body extent -1.52,-1.23 1.48,1.27, height 1.06
SOT23-132 [mm]
  rect 0.9x0.95 smd: 1(-0.95,-1.25) 3(0,1.25)
  rect 0.9x0.95 smd mask+0: 2(0.95,-1.25)
  silkscreen extent -1.3,-0.38 1.3,1.25, body extent -1.52,-1.23 1.48,1.27, height 1.06
SOT223-6 [mm]
  rect 2.346x0.632 smd paste+0 mask+0: 1(-3.01,2.54) 2(-3.01,1.27) 3(-3.01,0) 4(-3.01,-1.27) 5(-3.01,-2.54)
  rect 2.346x3.172 smd paste+0 mask+0: 6(3.01,0)
  silkscreen extent -3.14,-3.25 1.6,3.66, body extent -3.55,-3.25 3.55,3.25, height 1.66
SRP7050TA [mm] "Precision Wire Wound Inductor, 2-Leads, Body 7.30x6.60mm, IPC Medium Density"
  rect 3.3x3.15 smd: 1(-2.75,0) 2(2.75,0)
  silkscreen extent -3.8,-3.45 3.8,3.45, body extent -3.6,-3.3 3.6,3.3, height 4.91
SSOP16 [mm]
  rect 1.8x0.4 smd mask+0.05: 1(-2.553,2.222) 2(-2.553,1.588) 3(-2.553,0.953) 4(-2.553,0.318) 5(-2.553,-0.317) 6(-2.553,-0.952) 7(-2.553,-1.587) 8(-2.553,-2.222) 9(2.553,-2.222) 10(2.553,-1.588) 11(2.553,-0.953) 12(2.553,-0.318) 13(2.553,0.317) 14(2.553,0.952) 15(2.553,1.587) 16(2.553,2.222)
  silkscreen extent -3,-2.5 1.33,2.84, body extent -3,-2.45 3,2.45, height 1.75
TESTPOINT [mm]
  round 1.5 smd: 1(0,0)
  silkscreen extent -0.9,-0.9 0.9,0.9
TSSOP14 [mm] "TSSOP, 14-Leads, Body 5.00x4.40mm, Pitch 0.65mm, IPC High Density"
  oval 1.25x0.35 smd mask+0.05: 1(-2.825,1.95) 2(-2.825,1.3) 3(-2.825,0.65) 4(-2.825,0) 5(-2.825,-0.65) 6(-2.825,-1.3) 7(-2.825,-1.95) 8(2.825,-1.95) 9(2.825,-1.3) 10(2.825,-0.65) 11(2.825,0) 12(2.825,0.65) 13(2.825,1.3) 14(2.825,1.95)
  silkscreen extent -2.95,-2.5 1.8,2.8, body extent -3.23,-2.55 3.23,2.55, height 1.25

## Part data
C1 C2 C5 C6 C7 C8 C9 C10 C11 C12 C13 C14 C15 C16 C17 C18 C19 C20 C23 C24 C25 C26 C27 C28 C29 C30 C31 C32 C33 C34 C35 C36 C37 C40 C41: library part CM, "0603"
C3 C4 C38 C39: library part CN-ALU-SMD, "Polarized Capacitor (Axial)"
D1 D2 D3 D4 D5 D6 D7 D8 D9 D10 D11 D12 D13 D14 D15 D16 D17 D18 D19 D20 D21 D22 D23 D24 D25 D26 D27 D28 D29 D30 D31 D32 D34 D35 D38 D40: library part "Diode SMD", "DIODE GEN PURP 100V 150MA SOD123"
D49 D52: library part S2315, "TVS DIODE 12VWM 19VC SOT23, P/N:  S2312"
D50 D51 D53 D54 D55 D56 D57: "TVS DIODE 3.3VWM 8VC SOT23, P/N:   / S2303"
D58: library part "Diode SMD", "DIODE SCHOTTKY 40V 5A SMA"
H1 H2 H3 H4 H5 H6 H7 H8 H9 H10: library part PAD_HOLD
J1: library part JP8, "WR-PHD 2.54 mm Angled Socket Header"
J2: "WR-PHD 2.54 mm Dual Socket Header"
J3: library part CNT, "DNP"
L1: library part Inductor, "MLZ1608N100LT000"
L2: library part INDUCTOR, "SRP7050TA-150M"
LD1 LD2 LD3 LD4 LD5 LD6 LD7 LD8 LD9 LD10 LD11 LD12 LD13 LD14 LD15 LD16 LD17 LD18 LD19 LD20 LD21 LD22 LD23 LD24 LD25 LD26 LD27 LD28 LD29 LD30 LD31 LD32 LD33 LD34 LD35 LD36: library part LD
Q1 Q2: library part FET-N
R1 R2 R4 R5 R6 R7 R8 R10 R11 R12 R13 R14 R15 R16 R17 R18 R19 R20 R21 R22 R23 R24 R25 R26 R36: library part Res-SMD, "0603"
R9: library part Res-SMD, "1206"
R27: library part Res-SMD, "ERA-3AEB3241V"
U1: "IC REG LINEAR 3.3V 1.5A SOT223-6"
U2: library part MCP4902, "IC DAC 8BIT V-OUT 14TSSOP"
U3: "IC CMOS 4 CIRCUIT 16SSOP"
U5 U6 U7 U8 U9 U10: library part ADG1414, "IC SW SPST-NOX8 11.5OHM 24LFCSP"
U11: library part TPS543X, "8SOP"

## Free pads (board coordinates)
  round 0.6 hole 0.3: 1(0.502,1.632) 1(0.502,3.232) 1(0.502,4.832) 1(0.502,6.432) 1(0.502,8.032) 1(0.502,9.632) 1(0.502,11.232) 1(0.502,12.832) 1(0.502,14.432) 1(0.502,16.032) 1(0.502,17.632) 1(0.502,19.232) 1(0.502,20.832) 1(0.502,22.432) 1(0.502,24.032) 1(0.502,25.632) 1(0.502,27.232) 1(0.502,28.832) 1(0.502,30.432) 1(0.502,32.032) 1(0.502,33.632) 1(0.502,35.232) 1(0.502,36.832) 1(0.502,38.432) 1(0.502,79.924) 1(0.502,81.524) 1(0.502,83.124) 1(0.601,78.327) 1(1.323,84.498) 1(1.354,39.786) 1(1.636,0.502) 1(2.061,77.674) 1(2.466,40.937) 1(2.502,42.536) 1(2.502,44.136) 1(2.502,45.736) 1(2.502,47.336) 1(2.502,48.936) 1(2.502,50.536) 1(2.502,52.136) 1(2.502,53.736) 1(2.502,55.336) 1(2.502,56.936) 1(2.502,58.536) 1(2.502,60.136) 1(2.502,61.736) 1(2.502,63.336) 1(2.502,64.936) 1(2.502,66.536) 1(2.502,68.136) 1(2.502,69.736) 1(2.502,71.336) 1(2.502,72.936) 1(2.502,74.536) 1(2.502,76.136) 1(2.774,84.498) 1(3.236,0.502) 1(4.374,84.498) 1(4.836,0.502) 1(5.974,84.498) 1(6.436,0.502) 1(7.574,84.498) 1(8.036,0.502) 1(8.889,83.587) 1(9.581,82.144) 1(9.636,0.502) 1(11.117,81.698) 1(11.236,0.502) 1(12.717,81.698) 1(12.836,0.502) 1(14.317,81.698) 1(14.436,0.502) 1(15.917,81.698) 1(16.036,0.502) 1(17.517,81.698) 1(17.636,0.502) 1(19.117,81.698) 1(19.236,0.502) 1(20.717,81.698) 1(20.836,0.502) 1(22.317,81.698) 1(22.436,0.502) 1(23.917,81.698) 1(24.036,0.502) 1(25.517,81.698) 1(25.636,0.502) 1(27.117,81.698) 1(27.236,0.502) 1(28.717,81.698) 1(28.836,0.502) 1(30.317,81.698) 1(30.436,0.502) 1(31.917,81.698) 1(32.036,0.502) 1(33.517,81.698) 1(33.636,0.502) 1(35.117,81.698) 1(35.236,0.502) 1(36.7,81.93) 1(36.836,0.502) 1(37.659,83.21) 1(38.436,0.502) 1(38.619,84.491) 1(40.036,0.502) 1(40.219,84.498) 1(41.636,0.502) 1(41.819,84.498) 1(43.236,0.502) 1(43.419,84.498) 1(44.836,0.502) 1(45.019,84.498) 1(46.436,0.502) 1(46.619,84.464) 1(47.382,83.057) 1(48.036,0.502) 1(48.443,81.86) 1(49.636,0.502) 1(50.035,81.698) 1(51.236,0.502) 1(51.635,81.698) 1(52.836,0.502) 1(53.235,81.698) 1(54.436,0.502) 1(54.835,81.698) 1(56.036,0.502) 1(56.435,81.698) 1(57.636,0.502) 1(58.035,81.698) 1(59.236,0.502) 1(59.635,81.698) 1(60.836,0.502) 1(61.235,81.698) 1(62.436,0.502) 1(62.835,81.698) 1(64.036,0.502) 1(64.435,81.698) 1(65.636,0.502) 1(66.035,81.698) 1(67.236,0.502) 1(67.635,81.698) 1(68.836,0.502) 1(69.235,81.698) 1(70.436,0.502) 1(70.835,81.698) 1(72.036,0.502) 1(72.435,81.698) 1(73.636,0.502) 1(74.035,81.698) 1(75.236,0.502) 1(75.535,82.253) 1(76.12,83.742) 1(76.836,0.502) 1(77.53,84.498) 1(78.436,0.502) 1(79.13,84.498) 1(80.036,0.502) 1(80.73,84.498) 1(81.636,0.502) 1(82.33,84.498) 1(82.498,42.219) 1(82.498,43.819) 1(82.498,45.419) 1(82.498,47.019) 1(82.498,48.619) 1(82.498,50.219) 1(82.498,51.819) 1(82.498,53.419) 1(82.498,55.019) 1(82.498,56.619) 1(82.498,58.219) 1(82.498,59.819) 1(82.498,61.419) 1(82.498,63.019) 1(82.498,64.619) 1(82.498,66.219) 1(82.498,67.819) 1(82.498,69.419) 1(82.498,71.019) 1(82.498,72.619) 1(82.498,74.219) 1(82.498,75.819) 1(83.158,40.761) 1(83.191,77.261) 1(83.236,0.502) 1(83.93,84.48) 1(84.498,1.486) 1(84.498,3.086) 1(84.498,4.686) 1(84.498,6.286) 1(84.498,7.886) 1(84.498,9.486) 1(84.498,11.086) 1(84.498,12.686) 1(84.498,14.286) 1(84.498,15.886) 1(84.498,17.486) 1(84.498,19.086) 1(84.498,20.686) 1(84.498,22.286) 1(84.498,23.886) 1(84.498,25.486) 1(84.498,78.184) 1(84.498,79.784) 1(84.498,81.384) 1(84.498,82.984) 1(84.498,27.086) 1(84.498,28.686) 1(84.498,30.286) 1(84.498,31.886) 1(84.498,33.486) 1(84.498,35.086) 1(84.498,36.686) 1(84.498,38.286) 1(84.498,39.886)

## Via types
v1: diameter 0.4, hole 0.2, Top Layer to Bottom Layer, tented both sides, 583 vias

## Nets (pads, with @x,y where several pads share a name; then routed paths per layer and width w, separated by ;. In a path a pad name is that pad's centre, name@x,y a point inside that pad or via, vN(x,y) a via of type N, cw(c..) or ccw(c..) an arc to the next point about the centre after c; other vN are vias at no path point)
12V_EXP: C23.2 C25.2 C27.2 C29.2 C31.2 C33.2 C36.2 C38.1 D49.1 D49.3 D52.1 D52.3 J1.1 J2.1 J2.2 J3.1 U5.3 U5.5 U5.7 U5.9 U5.10 U5.12 U5.23 U6.3 U6.5 U6.7 U6.9 U6.10 U6.12 U6.23 U7.3 U7.5 U7.7 U7.9 U7.10 U7.12 U7.23 U8.3 U8.5 U8.7 U8.9 U8.10 U8.12 U8.23 U9.3 U9.5 U9.7 U9.9 U9.10 U9.12 U9.23 U10.3 U10.5 U10.7 U10.9 U10.10 U10.12 U10.23 U11.7 | length 405.3
  Top Layer w0.5: v1(62.992,34.25) v1(62.992,35.5) v1(62.992,36.75) 69.135,36.75 69.85,37.465 69.85,38.481 70.684,39.315 72.517,39.315 ; v1(62.992,41.45) v1(62.992,42.7) v1(62.992,43.95) 72.509,43.95 72.517,43.942 ; v1(62.992,48.65) v1(62.992,49.9) v1(62.992,51.15) 72.486,51.15 72.517,51.181 ; v1(62.992,55.85) v1(62.992,57.1) v1(62.992,58.35) 72.447,58.35 72.517,58.42 ; v1(62.992,63.05) v1(62.992,64.3) v1(62.992,65.55) 72.408,65.55 72.517,65.659 ; v1(62.992,72.75) v1(62.992,71.5) v1(62.992,70.25) 68.599,70.25 68.949,70.6 v1(72.517,70.6) 72.517,65.659 ; v1(72.517,34.6) 72.517,39.315 ; v1(75.758,54.803) 79.502,58.547 v1(79.502,71.628) ; 72.517,39.315 v1(72.517,41.8) 72.517,43.942 ; 72.517,43.942 v1(72.517,49) 72.517,51.181 ; 72.517,51.181 v1(72.517,56.2) 72.517,58.42 ; 72.517,58.42 v1(72.517,63.4) 72.517,65.659
  Mid-Layer 1 w0.6: v1(72.517,34.6) 72.814,34.303 72.814,30.195 70.95,28.331 70.95,16.7 J2.2@73.73,13.92
  Mid-Layer 1 w1.6: J2.1@73.73,11.38 J2.2@73.73,13.92
  Mid-Layer 2 w0.254: v1(62.992,34.25) 62.992,32.766 63.559,32.199 v1(65.163,32.199) v1(66.163,32.199) ; 62.992,39.497 63.09,39.399 v1(65.163,39.399) v1(66.163,39.399) ; 62.992,46.609 63.002,46.599 v1(65.163,46.599) v1(66.163,46.599) ; 62.992,53.848 63.041,53.799 v1(65.163,53.799) v1(66.163,53.799) ; 62.992,61.087 63.08,60.999 v1(65.163,60.999) v1(66.163,60.999) ; 62.992,68.199 v1(65.163,68.199) v1(66.163,68.199)
  Mid-Layer 2 w0.4: v1(62.992,34.25) v1(62.992,35.5) v1(62.992,36.75) 62.992,39.497 v1(62.992,41.45) v1(62.992,42.7) v1(62.992,43.95) 62.992,46.609 v1(62.992,48.65) v1(62.992,49.9) v1(62.992,51.15) 62.992,53.848 v1(62.992,55.85) v1(62.992,57.1) v1(62.992,58.35) 62.992,61.087 v1(62.992,63.05) v1(62.992,64.3) v1(62.992,65.55) 62.992,68.199 v1(62.992,70.25) v1(62.992,71.5) v1(62.992,72.75) ; v1(72.517,34.6) v1(72.517,41.8) v1(72.517,49) v1(72.517,56.2) ; v1(72.517,70.6) v1(72.517,63.4) v1(72.517,56.2) ; v1(75.758,54.803) 73.914,54.803 v1(72.517,56.2)
  Bottom Layer w0.254: v1(62.992,36.75) U9.12@64.011,36.75 ; v1(62.992,43.95) U8.12@64.011,43.95 ; v1(62.992,51.15) U6.12@64.011,51.15 ; v1(62.992,58.35) U10.12@64.011,58.35 ; v1(62.992,65.55) U7.12@64.011,65.55 ; v1(62.992,72.75) U5.12@64.011,72.75 ; U9.7@64.011,34.25 v1(62.992,34.25) 62.992,32.766 63.559,32.199 v1(65.163,32.199) ; U9.9@64.011,35.25 63.242,35.25 v1(62.992,35.5) 63.238,35.746 64.007,35.746 U9.10@64.011,35.75 ; U8.7@64.011,41.45 v1(62.992,41.45) 62.992,40.005 63.598,39.399 v1(65.163,39.399) ; U8.9@64.011,42.45 63.242,42.45 v1(62.992,42.7) 63.242,42.95 U8.10@64.011,42.95 ; U6.7@64.011,48.65 v1(62.992,48.65) 62.992,47.117 63.51,46.599 v1(65.163,46.599) ; U6.9@64.011,49.65 63.242,49.65 v1(62.992,49.9) 63.242,50.15 U6.10@64.011,50.15 ; U10.7@64.011,55.85 v1(62.992,55.85) 62.992,54.483 63.676,53.799 v1(65.163,53.799) ; U10.9@64.011,56.85 63.242,56.85 v1(62.992,57.1) 63.242,57.35 U10.10@64.011,57.35 ; U7.7@64.011,63.05 v1(62.992,63.05) 62.992,61.595 63.588,60.999 v1(65.163,60.999) ; U7.9@64.011,64.05 63.242,64.05 v1(62.992,64.3) 63.242,64.55 U7.10@64.011,64.55 ; U5.7@64.011,70.25 v1(62.992,70.25) 62.992,68.834 63.627,68.199 v1(65.163,68.199) ; U5.9@64.011,71.25 63.242,71.25 v1(62.992,71.5) 63.242,71.75 U5.10@64.011,71.75 ; U9.5@65.163,33.598 v1(65.163,32.199) ; U8.5@65.163,40.798 v1(65.163,39.399) ; U6.5@65.163,47.998 v1(65.163,46.599) ; U10.5@65.163,55.198 v1(65.163,53.799) ; U7.5@65.163,62.398 v1(65.163,60.999) ; U5.5@65.163,69.598 v1(65.163,68.199) ; U9.3@66.163,33.598 v1(66.163,32.199) v1(65.163,32.199) ; U8.3@66.163,40.798 v1(66.163,39.399) v1(65.163,39.399) ; U6.3@66.163,47.998 v1(66.163,46.599) v1(65.163,46.599) ; U10.3@66.163,55.198 v1(66.163,53.799) v1(65.163,53.799) ; U7.3@66.163,62.398 v1(66.163,60.999) v1(65.163,60.999) ; U5.3@66.163,69.598 v1(66.163,68.199) v1(65.163,68.199) ; U9.23@67.815,34.75 68.988,34.75 69.697,35.459 71.023,35.459 71.559,34.923 71.609,34.923 71.882,34.65 C33.2@71.882,34.6 ; U8.23@67.815,41.95 69.001,41.95 69.723,42.672 71.055,42.672 71.604,42.123 71.609,42.123 71.882,41.85 C31.2@71.882,41.8 ; U6.23@67.815,49.15 68.962,49.15 69.723,49.911 71.021,49.911 71.882,49.05 C29.2@71.882,49 ; U10.23@67.815,56.35 68.993,56.35 69.707,57.064 71.068,57.064 71.882,56.25 C27.2@71.882,56.2 ; U7.23@67.815,63.55 69.032,63.55 69.793,64.311 71.025,64.311 71.609,63.727 71.609,63.673 C25.2@71.882,63.4 ; U5.23@67.815,70.75 68.634,70.75 69.203,70.181 69.203,69.62 69.608,69.215 71.423,69.215 71.882,69.674 C23.2@71.882,70.6
  Bottom Layer w0.4: D52.3@53.993,27.198 D52.1@55.893,27.198 58.019,27.198 60.833,24.384 60.833,22.733 59.182,21.082 59.182,20.725 ; C36.2@57.023,20.725 59.182,20.725 ; 67.818,17.526 60.102,17.526 59.182,18.446 59.182,20.725 ; C33.2@71.882,34.6 v1(72.517,34.6) ; C31.2@71.882,41.8 v1(72.517,41.8) ; C29.2@71.882,49 v1(72.517,49) ; C27.2@71.882,56.2 v1(72.517,56.2) ; C25.2@71.882,63.4 v1(72.517,63.4) ; C23.2@71.882,70.6 v1(72.517,70.6) ; v1(75.758,54.803) D49.1@76.728,54.803 D49.3@76.728,56.703 ; 77.226,71.628 v1(79.502,71.628)
  Bottom Layer w0.6: C38.1@66.007,19.558 66.203,19.362 67.496,19.362 67.945,18.913 67.945,13.843
  Bottom Layer w1.4: J2.1@73.73,11.38 73.83,11.28 73.83,9.355 75.184,8.001 J3.1@75.184,5.794
  Bottom Layer w1.6: J2.1@73.73,11.38 J2.2@73.73,13.92
+3.3: C1.2 C4.1 C7.2 C10.2 C16.2 D57.1 D57.3 J1.4 L1.2 R1.2 R2.1 R4.2 R15.2 R16.2 R17.2 R18.2 R19.2 R20.2 R21.2 R22.2 R23.2 R24.2 R25.1 R36.2 U1.4 U1.5 U2.1 U3.4 | length 181.1
  Top Layer w0.6: v1(41.625,20.32) 48.514,20.32 50.62,22.426 v1(50.62,31.242)
  Mid-Layer 2 w0.4: v1(50.62,31.242) 70.104,31.242 ; v1(70.104,69.841) v1(70.104,62.657) v1(70.104,55.473) v1(70.104,48.289) v1(70.104,41.105) v1(70.104,33.921) 70.104,31.242 ; v1(78.74,67.818) 78.74,53.594 v1(76.708,51.562) 76.708,47.244 75.311,45.847 75.311,32.258 74.295,31.242 70.104,31.242
  Bottom Layer w0.35: U3.4@31.814,13.417 31.814,14.638 32.257,15.081 34.6,15.081 35.052,14.629 35.052,13.303 35.571,12.784 C16.2@36.449,12.784 ; 38.288,13.294 38.288,13.398 39.19,14.3 C4.1@39.294,14.3 ; U2.1@50.577,27.477 50.598,27.477 C7.2@50.598,29.567
  Bottom Layer w0.4: v1@41.498,20.447 v1(41.625,20.32) v1(42.418,20.32) 49.022,20.32 ; 46.609,20.447 R25.1@46.609,21.463 ; R4.2@48.984,19.177 48.984,20.282 49.022,20.32 ; C7.2@50.598,29.567 C7.2@50.62,29.589 v1(50.62,31.242) ; R2.1@50.8,21.463 50.8,20.574 50.546,20.32 49.022,20.32 ; R1.2@70.066,30.988 R24.2@70.066,33.02 70.104,33.058 v1(70.104,33.921) R36.2@70.104,34.573 ; R23.2@70.066,40.196 70.104,40.233 v1(70.104,41.105) R18.2@70.104,41.773 ; R22.2@70.066,47.371 70.104,47.409 v1(70.104,48.289) R17.2@70.104,48.973 ; R21.2@70.066,54.547 70.104,54.584 v1(70.104,55.473) R16.2@70.104,56.173 ; R20.2@70.066,61.722 70.104,61.76 v1(70.104,62.657) R15.2@70.104,63.373 ; v1@70.104,69.855 70.104,70.473 R19.2@70.104,70.573 ; D57.1@76.708,50.59 D57.3@76.708,52.45
  Bottom Layer w0.5: J1.4@76.343,67.848 78.71,67.848 v1(78.74,67.818)
  Bottom Layer w0.6: C10.2@41.38,19.177 41.411,19.177 41.511,19.077 41.511,18.214 41.863,17.862 48.175,17.862 48.833,17.204 C1.2@48.833,16.685 ; C10.2@41.398,19.177 41.498,19.277 41.498,20.447 41.498,22.069 L1.2@41.617,22.187 ; C1.2@48.769,16.443 C1.2@48.819,16.394
  Bottom Layer w0.8: C16.2@36.449,12.784 37.778,12.784 38.288,13.294 ; C4.1@39.294,14.3 39.37,14.376 39.37,18.521 40.026,19.177 C10.2@41.38,19.177
+5: C2.2 C3.1 C37.2 C39.1 J3.2 L2.2 R26.2 U1.1 U1.2 | length 13.1
  Bottom Layer w0.6: C2.2@51.486,10.276 C37.2@54.153,10.276 54.18,10.249 R26.2@57.023,10.249 59.347,10.249 60.413,9.183 L2.2@60.413,5.461
  other v1: 57.531,2.54 58.166,2.54 58.801,2.54 74.806,2.925 75.568,2.925 57.531,3.175 58.166,3.175 58.801,3.175
DAC_CS: D55.3 J2.10 R4.1 U2.3 | length 44
  Mid-Layer 2 w0.3: v1(64.135,27.198) 65.004,28.067 74.252,28.067 75.03,27.29 75.03,22.78 J2.10@76.27,21.54
  Mid-Layer 2 w0.35: v1(51.816,26.177) 55.499,26.177 56.52,27.198 v1(64.135,27.198)
  Bottom Layer w0.35: R4.1@50.8,19.177 51.441,19.177 51.803,19.54 51.803,22.121 51.319,22.606 50.023,22.606 49.004,23.625 49.004,25.636 49.545,26.177 U2.3@50.577,26.177 v1(51.816,26.177)
  Bottom Layer w0.4: v1(64.135,27.198) D55.3@65.344,27.198
DAC_DRV_EXT: R10.1 TP2.1 U2.10 | length 20.6
  Top Layer w0.4: v1(32.131,24.987) 43.705,24.987 v1(43.815,24.877)
  Bottom Layer w0.35: v1(43.815,24.877) U2.10@44.927,24.877
  Bottom Layer w0.4: TP2.1@26.543,25.876 29.21,25.876 30.099,24.987 v1(32.131,24.987) 32.766,24.987 33.02,24.733 R10.1@33.02,23.971
DAC_DRV_INT: R5.1 TP1.1 U2.14 | length 29.8
  Top Layer w0.4: v1(34.671,7.969) 37.687,7.969 40.513,10.795 40.513,22.282 42.107,23.876 43.991,23.876 44.927,24.812 44.927,25.685 v1(44.927,28.194)
  Bottom Layer w0.4: R5.1@32.829,7.969 v1(34.671,7.969) ; U2.14@44.927,27.609 v1(44.927,28.194)
GND: C3.2 C4.2 C5.1 C6.1 C8.1 C11.1 C12.1 C13.1 C15.1 C17.1 C18.1 C20.1 C24.1 C26.1 C28.1 C30.1 C32.1 C34.1 C38.2 C39.2 C40.1 C41.1 D49.2 D50.2 D51.2 D52.2 D53.2 D54.2 D55.2 D56.2 D57.2 D58.1 J1.2 J2.13 J2.14 R9.1 R14.1 R27.1 U1.3 U1.6 U2.12 U3.13 U5.1 U5.18 U5.HTAB U6.1 U6.18 U6.HTAB U7.1 U7.18 U7.HTAB U8.1 U8.18 U8.HTAB U9.1 U9.18 U9.HTAB U10.1 U10.18 U10.HTAB U11.6 U11.9
  other v1: 8.255,2.667 13.208,2.667 18.161,2.667 23.114,2.667 37.465,2.86 38.227,3.419 8.255,4.469 13.208,4.469 18.161,4.469 23.114,4.469 26.035,4.564 38.227,5.01 52.832,5.567 68.834,5.821 8.255,6.271 13.208,6.271 18.161,6.271 23.114,6.271 32.75,6.403 57.912,6.477 38.227,6.601 34.671,6.826 52.832,6.911 68.834,7.165 76.962,7.186 57.912,7.821 38.721,7.874 40.312,7.874 41.903,7.874 43.494,7.874 45.085,7.874 8.255,8.072 13.208,8.072 18.161,8.072 52.832,8.255 79.121,8.276 4.445,8.366 68.834,8.509 76.962,8.53 26.435,9.112 57.912,9.165 79.121,9.62 81.661,9.62 8.255,9.874 13.208,9.874 18.161,9.874 23.114,9.874 4.445,10.168 49.784,10.287 68.707,10.541 70.051,10.541 71.395,10.541 67.691,10.668 79.121,10.964 81.661,10.964 30.099,11.017 28.396,11.398 55.626,11.43 52.832,11.663 8.255,11.676 13.208,11.676 18.161,11.676 23.114,11.676 44.577,11.684 46.379,11.684 26.035,11.771 4.445,11.97 68.707,12.192 70.051,12.192 71.395,12.192 79.121,12.308 81.661,12.308 44.577,12.446 55.626,13.021 52.832,13.254 8.255,13.478 13.208,13.478 18.161,13.478 23.114,13.478 79.121,13.653 81.661,13.653 4.445,13.772 25.019,13.811 28.067,13.97 43.815,14.3 45.328,14.3 37.465,14.573 55.626,14.612 52.832,14.845 79.121,14.997 81.661,14.997 8.255,15.28 13.208,15.28 18.161,15.28 23.114,15.28 68.686,15.367 70.03,15.367 4.445,15.573 25.146,15.946 55.626,16.203 79.121,16.341 81.661,16.341 50.546,16.383 52.832,16.436 38.1,16.721 8.255,17.081 13.208,17.081 18.161,17.081 23.114,17.081 4.445,17.375 79.121,17.685 81.661,17.685 25.146,17.748 55.626,17.794 58.335,17.794 52.832,18.027 38.1,18.312 35.433,18.51 8.255,18.883 13.208,18.883 18.161,18.883 23.114,18.883 79.121,19.029 81.661,19.029 4.445,19.177 48.133,19.431 31.814,20.034 79.121,20.373 81.661,20.373 38.989,20.574 8.255,20.685 13.208,20.685 18.161,20.685 23.114,20.685 55.626,20.725 25.146,20.78 52.705,20.828 70.104,20.934 4.445,20.979 43.561,21.53 47.879,21.53 29.718,21.801 38.989,21.9 70.104,22.278 61.595,22.352 63.754,22.352 52.705,22.419 8.255,22.487 13.208,22.487 18.161,22.487 23.114,22.487 25.146,22.582 44.196,22.733 43.18,22.86 38.989,23.227 70.104,23.622 8.255,24.289 13.208,24.289 18.161,24.289 23.114,24.289 32.131,24.352 25.146,24.384 36.449,25.622 8.255,26.091 13.208,26.091 18.161,26.091 23.114,26.091 70.104,26.088 25.146,26.186 45.974,26.177 63.373,26.289 66.294,26.289 51.604,26.836 29.043,27.4 70.104,27.432 8.255,27.892 13.208,27.892 18.161,27.892 23.114,27.892 30.785,27.926 31.581,27.926 52.197,28.515 57.573,28.762 72.918,29.039 70.104,29.263 37.465,29.316 63.5,29.464 44.154,29.589 8.255,29.694 13.208,29.694 18.161,29.694 23.114,29.694 76.073,29.75 25.146,29.789 4.445,29.972 52.197,30.353 53.541,30.353 56.229,30.353 57.573,30.353 58.917,30.353 63.5,30.48 67.564,30.48 79.428,30.988 80.772,30.988 82.116,30.988 76.073,31.094 35.687,31.242 37.031,31.242 38.375,31.242 39.719,31.242 41.063,31.242 42.407,31.242 43.751,31.242 45.096,31.242 46.44,31.242 47.784,31.242 49.128,31.242 8.255,31.496 13.208,31.496 18.161,31.496 23.114,31.496 27.178,31.496 4.445,31.774 61.595,32.004 67.183,32.199 76.073,32.438 76.073,33.782 61.595,34.29 74.422,34.6 65.286,34.734 65.921,34.734 66.556,34.734 76.073,35.126 65.286,35.369 65.921,35.369 66.556,35.369 65.286,36.004 65.921,36.004 66.556,36.004 76.073,36.47 76.073,37.814 68.707,37.846 73.787,37.973 61.595,38.1 70.993,38.1 67.183,38.422 68.707,38.989 76.073,39.158 67.183,39.399 76.073,40.502 77.47,40.513 79.375,40.513 5.461,40.799 61.595,41.402 74.422,41.783 65.326,41.893 65.961,41.893 66.596,41.893 80.391,42.1 65.326,42.528 65.961,42.528 66.596,42.528 5.461,42.601 65.326,43.163 65.961,43.163 66.596,43.163 80.391,43.902 5.461,44.402 68.707,44.831 61.722,45.085 79.248,45.085 74.422,45.212 71.247,45.466 67.183,45.622 80.391,45.704 68.707,46.175 5.461,46.204 67.183,46.599 75.819,47.498 80.391,47.506 5.461,48.006 61.722,48.641 74.422,49.022 65.286,49.149 65.921,49.149 66.556,49.149 80.391,49.308 79.375,49.403 75.692,49.456 65.286,49.784 65.921,49.784 66.556,49.784 5.461,49.808 65.286,50.419 65.921,50.419 66.556,50.419 75.692,50.8 80.391,51.11 5.461,51.61 75.692,52.144 68.707,52.197 61.849,52.324 73.66,52.578 71.628,52.705 67.183,52.822 80.391,52.911 5.461,53.411 75.692,53.488 68.707,53.541 79.375,53.594 67.183,53.799 80.391,54.713 5.461,55.213 61.595,55.88 75.692,56.06 74.422,56.2 65.293,56.349 65.928,56.349 66.563,56.349 80.391,56.515 65.293,56.984 65.928,56.984 66.563,56.984 5.461,57.015 75.692,57.404 65.293,57.619 65.928,57.619 66.563,57.619 80.391,57.912 5.461,58.817 61.722,59.436 73.787,59.563 68.707,59.69 67.183,60.022 70.993,60.198 5.461,60.619 68.707,60.706 61.722,60.96 67.183,60.999 5.461,62.42 61.341,63.373 74.422,63.4 65.332,63.542 65.967,63.542 66.602,63.542 65.332,64.177 65.967,64.177 66.602,64.177 5.461,64.222 62.23,64.389 77.851,64.77 65.332,64.812 65.967,64.812 66.602,64.812 5.461,66.024 61.849,66.802 71.247,67.056 68.707,67.183 67.183,67.222 5.461,67.826 71.247,67.945 61.595,68.199 67.183,68.199 68.707,68.199 75.057,68.199 5.461,69.628 70.866,69.723 61.341,70.485 74.549,70.612 65.313,70.98 65.948,70.98 66.583,70.98 5.461,71.43 65.313,71.615 65.948,71.615 66.583,71.615 65.313,72.25 65.948,72.25 66.583,72.25 5.461,73.231 62.357,73.66 67.183,74.422 68.94,74.549 70.284,74.549 71.628,74.549 72.972,74.549 5.461,75.033 74.922,75.517 76.724,75.517 5.461,76.835 60.508,77.319 62.309,77.319 64.111,77.319 65.913,77.319 67.715,77.319 69.517,77.319 71.318,77.319 73.12,77.319 74.922,77.319 76.724,77.319 78.526,77.319 8.255,79.121 10.057,79.121 11.859,79.121 13.66,79.121 15.462,79.121 17.264,79.121 19.066,79.121 20.868,79.121 22.669,79.121 24.471,79.121 26.273,79.121 28.075,79.121 29.877,79.121 31.679,79.121 33.48,79.121 35.282,79.121 37.084,79.121 38.886,79.121 46.093,79.121 47.895,79.121 49.697,79.121 51.498,79.121 53.3,79.121 55.102,79.121 56.904,79.121 58.706,79.121 60.508,79.121 62.309,79.121 64.111,79.121 65.913,79.121 67.715,79.121 69.517,79.121 71.318,79.121 73.12,79.121 74.922,79.121 76.724,79.121
I_LD_EXT: J1.3 Q2.3 | length 96.7
  Mid-Layer 2 w0.5: v1(29.043,28.035) 33.52,32.512 58.547,32.512 60.325,34.29 60.325,73.533 62.357,75.565 73.568,75.565 75.311,73.822 75.311,69.342 v1(75.057,69.088)
  Bottom Layer w0.5: v1(29.043,28.035) Q2.3@29.043,28.894 ; v1(75.057,69.088) 76.263,69.088 J1.3@76.343,69.008